# Allegro board LCDPORT_20151023_3.brd
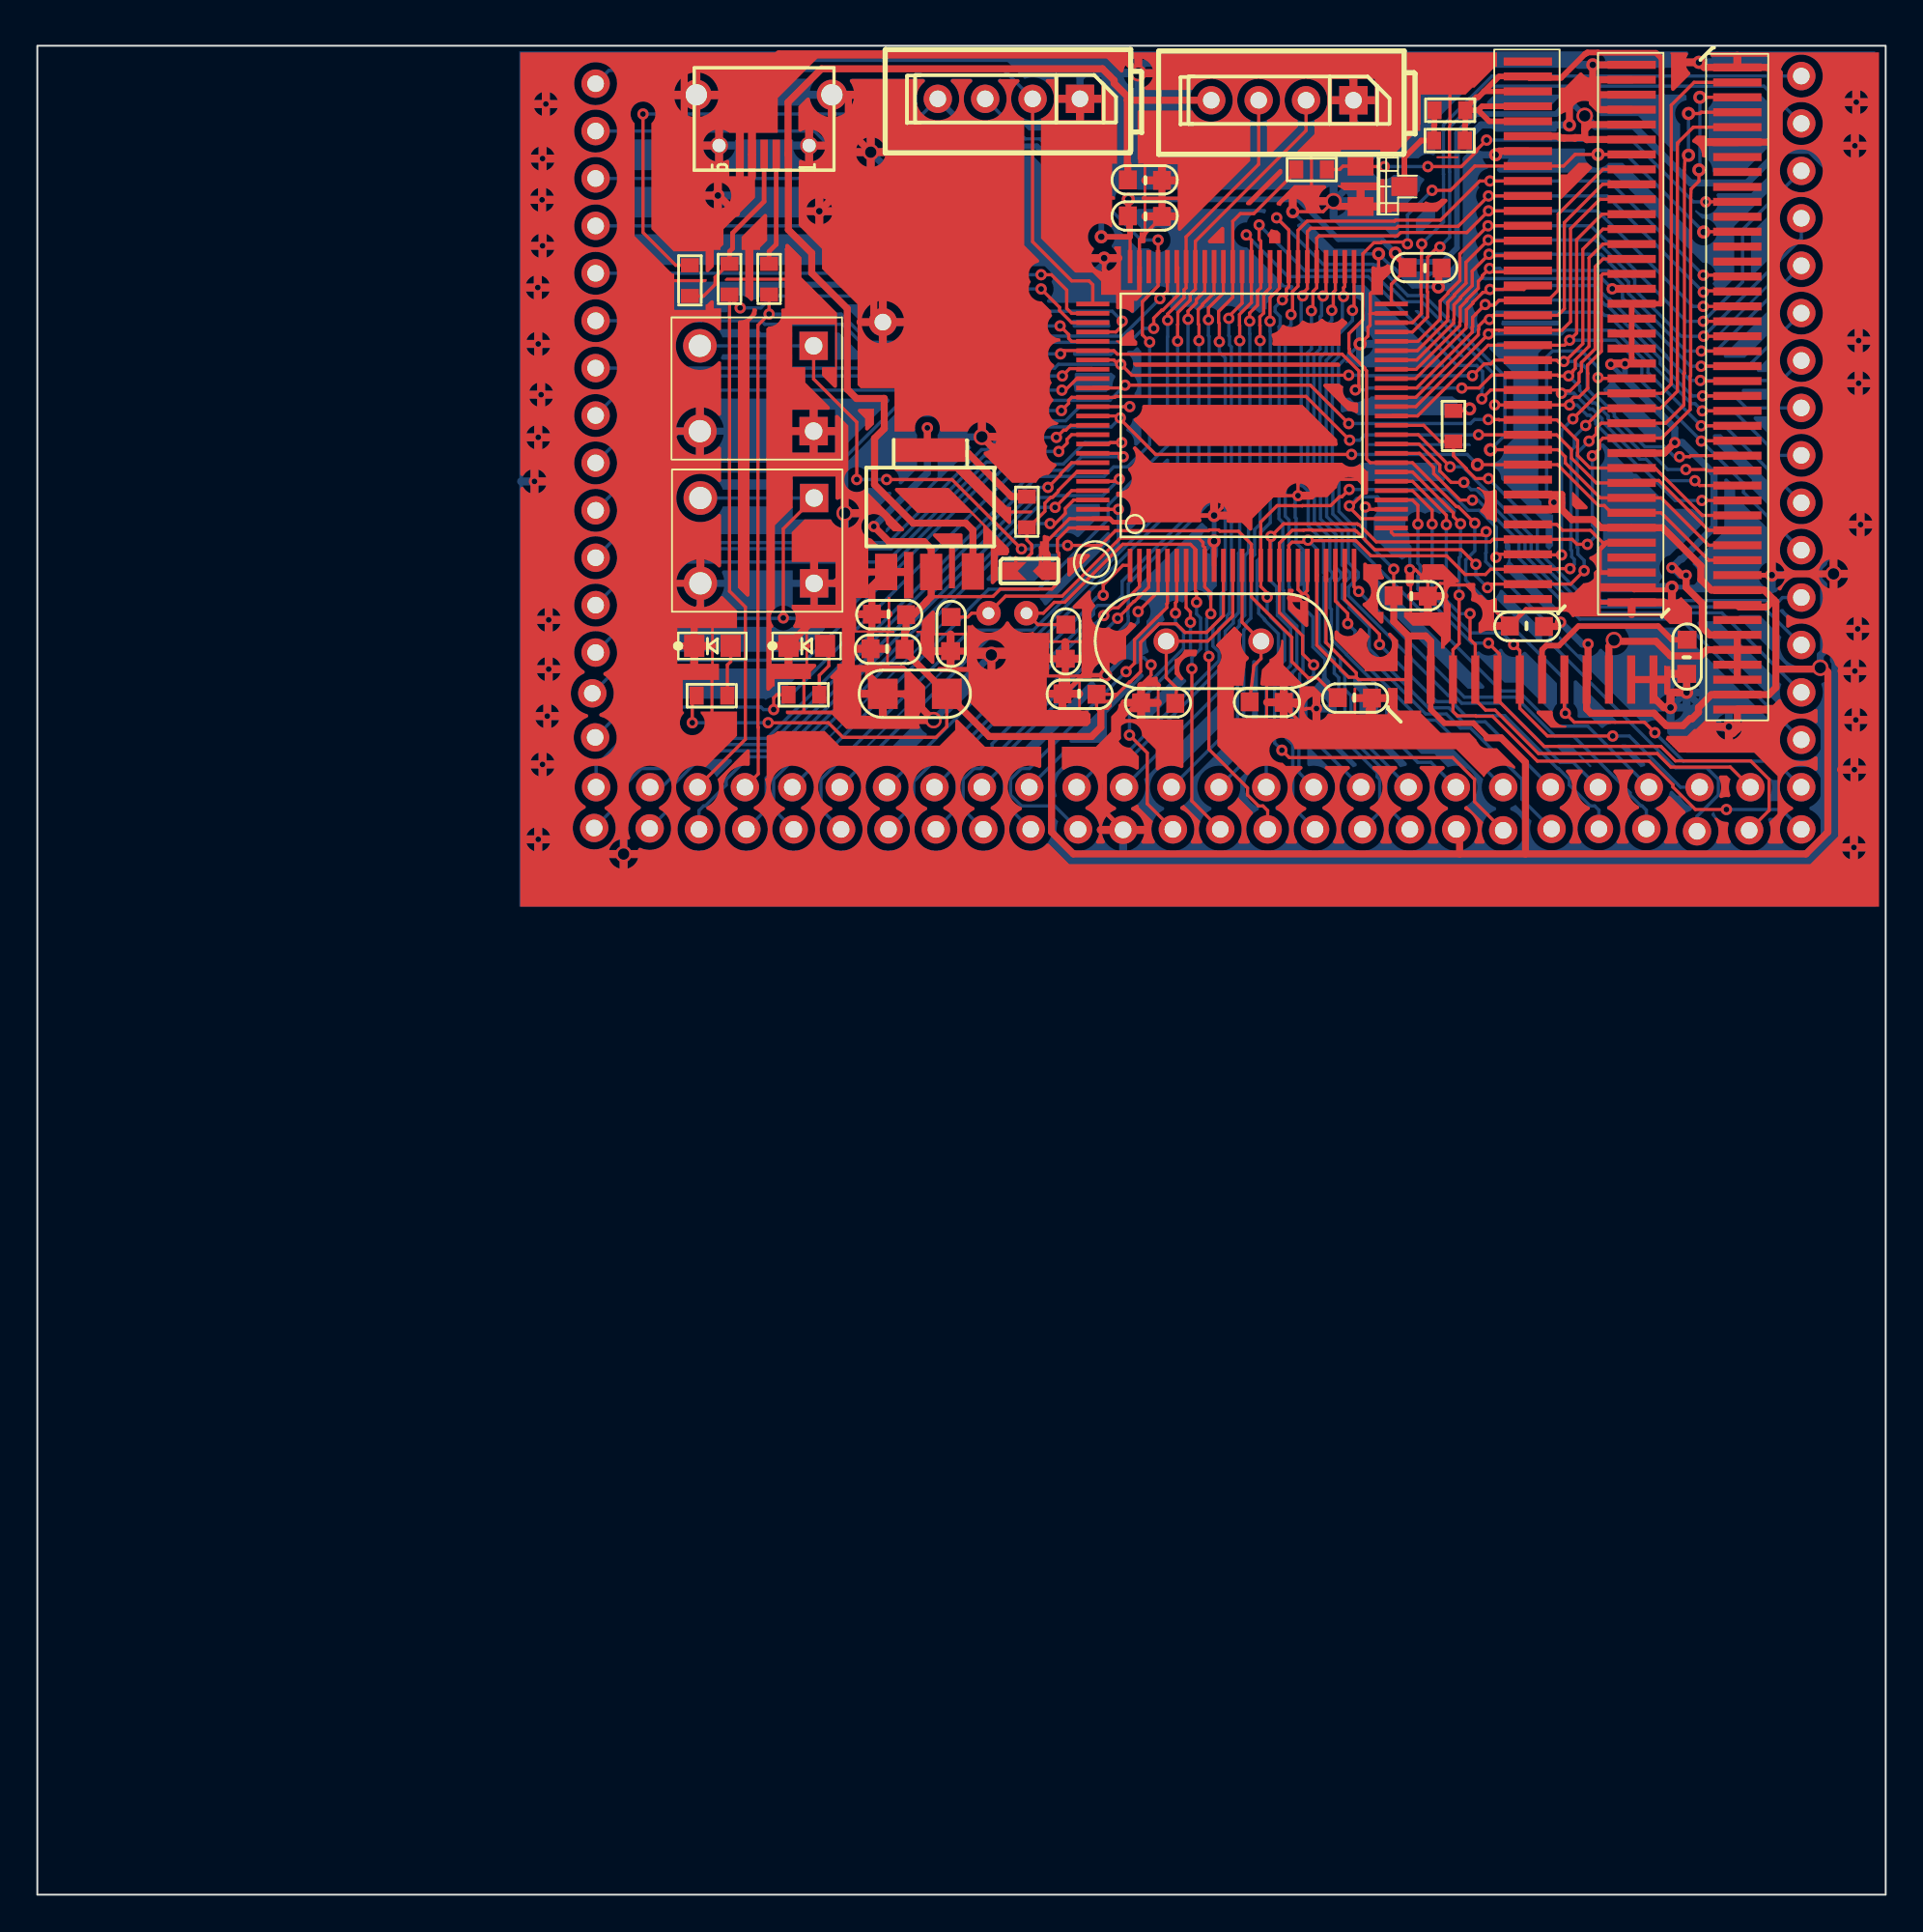
[diagram p0: board, top side]
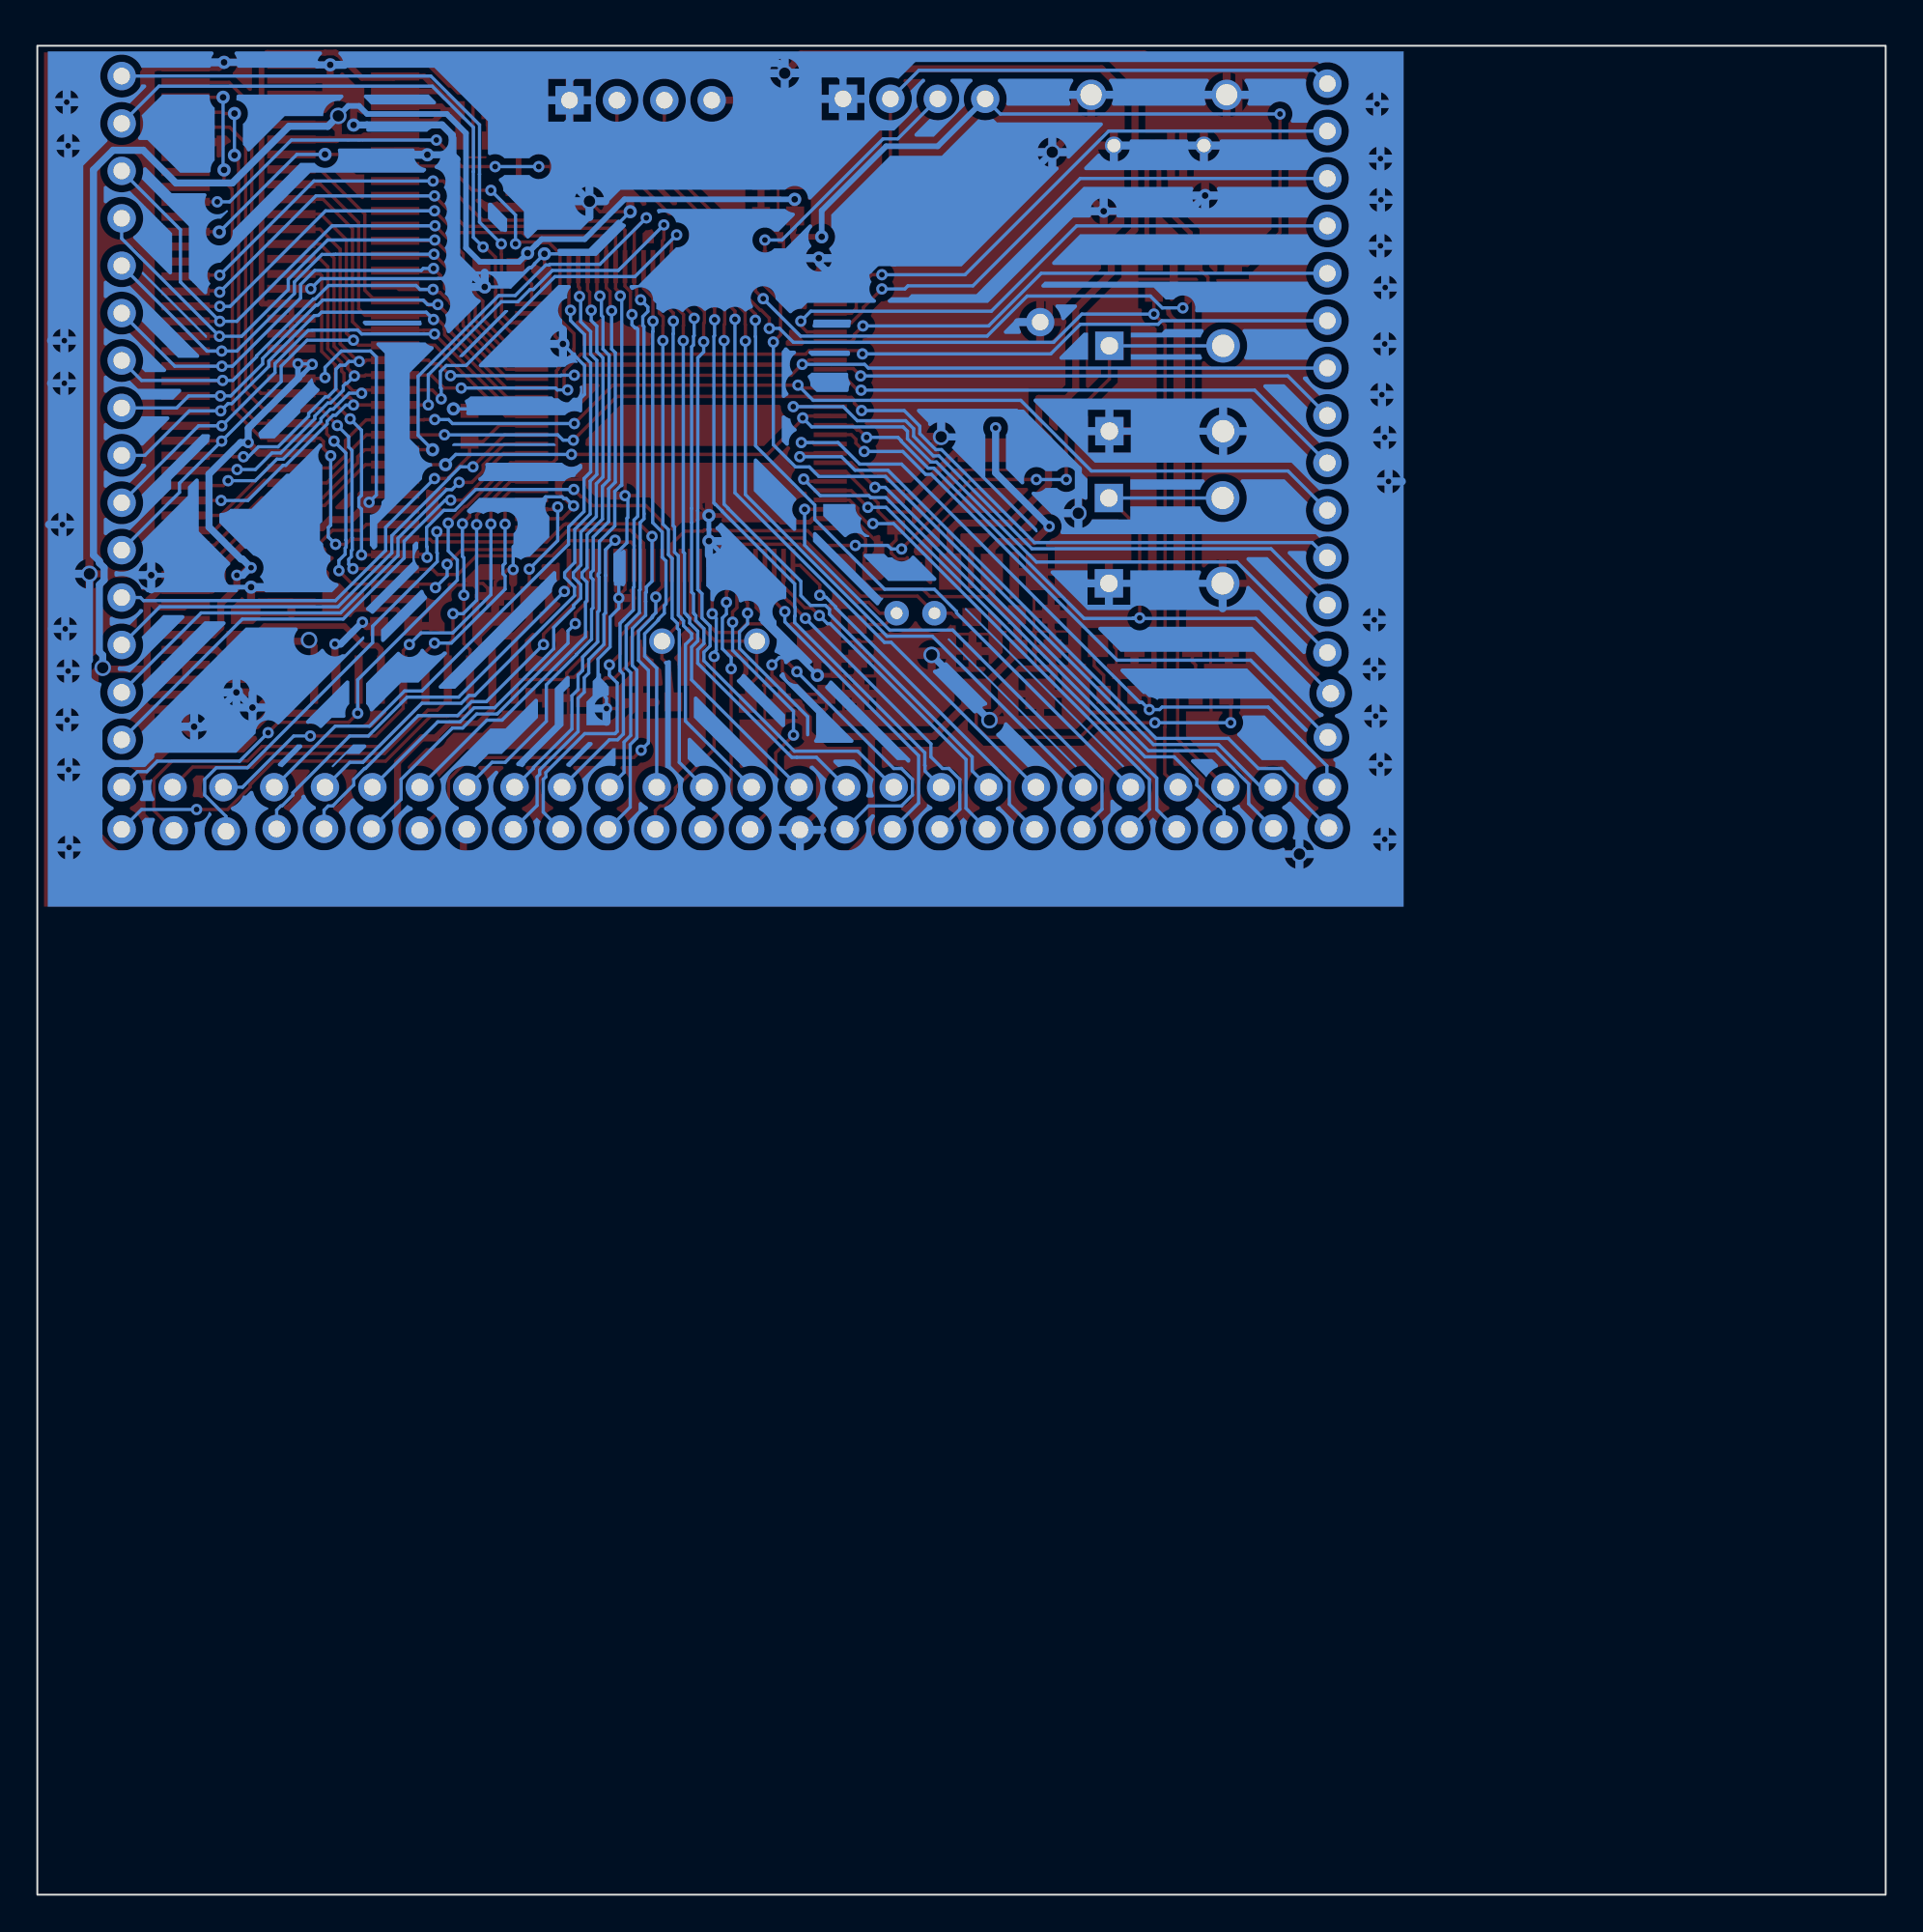
[diagram p1: board, bottom side, seen from below]

Outline 99.06 x 99.06 mm; copper layers: TOP, BOTTOM. Coordinates in mm from the lower left corner of the outline.
Outline path: rectangle 0,0 99.06,99.06

## Placement (name value [footprint] x y rotation side)
C3  0.1U  [C0603X]  70.64 64.11 0 top
C4  15pF  [C0603]  60.07 63.86 180 top
C5  15pF  [C0603]  65.89 63.88 0 top
C6  10pF  [C0603]  55.12 67.13 90 top
C7  0.1uf  [C0603X]  74.32 87.17 180 top
C8  0.1uf  [C0603X]  79.86 67.94 0 top
C9  0.1uf  [C0603X]  55.88 64.31 0 top
C10  0.1uf  [C0603X]  59.33 89.94 180 top
C11  10pF  [C0603]  48.97 67.54 90 top
C13  10uf/1206  [C1206]  48.74 64.34 270 top
C14  0.1uf  [C0603X]  59.33 91.87 180 top
C32  0.1uf  [C0603X]  73.58 69.6 180 top
C33  0.1uf  [C0603X]  45.67 68.58 0 top
C34  0.1uf  [C0603X]  45.59 66.73 0 top
C35  0.1uf  [C0603X]  88.42 66.34 90 top
GND1  TEST  [TEST_60C35D]  58.19 57.05 0 top
GND9  TEST  [TEST_60C35D]  45.31 84.25 0 top
J11  0  [DEBUG0603_V1]  53.34 70.92 180 top
J_HX8352A  -  [FFC_08_44]  91.11 80.7 0 top
J_R61509  FFC_08_44  [FFC_08_37]  79.88 86.61 180 top
J_ST7585  FFC_08_44  [FFC_12_12]  79.45 65.1 90 top
J_XT350377  FFC_08_44  [FFC_08_37]  85.45 86.44 180 top
K1  KEY  [SW4H]  35.53 70.26 90 top
LED1  LED  [LED_SMD]  40.11 66.9 90 top
LED_POWER  LED  [LED_SMD]  35.05 66.9 90 top
PA0  TEST  [TEST_60C35D]  81.15 57.1 0 top
PA1  TEST  [TEST_60C35D]  83.69 57.1 0 top
PA2  TEST  [TEST_60C35D]  86.23 57.1 0 top
PA3  TEST  [TEST_60C35D]  88.95 56.97 0 top
PA4  TEST  [TEST_60C35D]  91.74 57.02 0 top
PA5  TEST  [TEST_60C35D]  89.09 59.33 0 top
PA6  TEST  [TEST_60C35D]  91.81 59.33 0 top
PA7  TEST  [TEST_60C35D]  94.54 57.07 0 top
PA8  TEST  [TEST_60C35D]  45.54 59.33 0 top
PA9  TEST  [TEST_60C35D]  43 59.33 0 top
PA10  TEST  [TEST_60C35D]  40.46 59.33 0 top
PA11  TEST  [TEST_60C35D]  37.92 59.33 0 top
PA12  TEST  [TEST_60C35D]  35.38 59.33 0 top
PA13  TEST  [TEST_60C35D]  32.84 59.33 0 top
PA14  TEST  [TEST_60C35D]  29.92 97.03 0 top
PA15  TEST  [TEST_60C35D]  29.92 94.49 0 top
PB0  TEST  [TEST_60C35D]  94.54 64.41 0 top
PB1  TEST  [TEST_60C35D]  94.54 66.95 0 top
PB2  TEST  [TEST_60C35D]  94.54 69.49 0 top
PB3  TEST  [TEST_60C35D]  29.74 64.36 0 top
PB4  TEST  [TEST_60C35D]  29.9 62 0 top
PB5  TEST  [TEST_60C35D]  29.95 59.33 0 top
PB6  TEST  [TEST_60C35D]  29.84 57.15 0 top
PB7  TEST  [TEST_60C35D]  32.82 57.12 0 top
PB8  TEST  [TEST_60C35D]  35.46 57.07 0 top
PB9  TEST  [TEST_60C35D]  38 57.07 0 top
PB10  TEST  [TEST_60C35D]  94.54 94.89 0 top
PB11  TEST  [TEST_60C35D]  94.54 97.43 0 top
PB12  TEST  [TEST_60C35D]  86.37 59.33 0 top
PB13  TEST  [TEST_60C35D]  83.64 59.33 0 top
PB14  TEST  [TEST_60C35D]  81.1 59.33 0 top
PB15  TEST  [TEST_60C35D]  78.56 59.33 0 top
PC0  TEST  [TEST_60C35D]  78.56 57.02 0 top
PC1  TEST  [TEST_60C35D]  68.48 57.07 0 top
PC2  TEST  [TEST_60C35D]  71.02 57.07 0 top
PC3  TEST  [TEST_60C35D]  73.56 57.07 0 top
PC4  TEST  [TEST_60C35D]  94.53 59.33 0 top
PC5  TEST  [TEST_60C35D]  94.54 61.87 0 top
PC6  TEST  [TEST_60C35D]  55.7 59.33 0 top
PC7  TEST  [TEST_60C35D]  53.16 59.33 0 top
PC8  TEST  [TEST_60C35D]  50.62 59.33 0 top
PC9  TEST  [TEST_60C35D]  48.08 59.33 0 top
PC10  TEST  [TEST_60C35D]  29.92 91.95 0 top
PC11  TEST  [TEST_60C35D]  29.92 89.41 0 top
PC12  TEST  [TEST_60C35D]  29.92 86.87 0 top
PC13  TEST  [TEST_60C35D]  60.86 57.07 0 top
PC14  TEST  [TEST_60C35D]  63.4 57.07 0 top
PC15  TEST  [TEST_60C35D]  65.94 57.07 0 top
PD0  TEST  [TEST_60C35D]  29.92 84.33 0 top
PD1  TEST  [TEST_60C35D]  29.92 81.79 0 top
PD2  TEST  [TEST_60C35D]  29.92 79.25 0 top
PD3  TEST  [TEST_60C35D]  29.92 76.71 0 top
PD4  TEST  [TEST_60C35D]  29.92 74.17 0 top
PD5  TEST  [TEST_60C35D]  29.92 71.63 0 top
PD6  TEST  [TEST_60C35D]  29.92 69.09 0 top
PD7  TEST  [TEST_60C35D]  29.92 66.55 0 top
PD8  TEST  [TEST_60C35D]  76.02 59.33 0 top
PD9  TEST  [TEST_60C35D]  73.48 59.33 0 top
PD10  TEST  [TEST_60C35D]  70.94 59.33 0 top
PD11  TEST  [TEST_60C35D]  68.4 59.33 0 top
PD12  TEST  [TEST_60C35D]  65.86 59.33 0 top
PD13  TEST  [TEST_60C35D]  63.32 59.33 0 top
PD14  TEST  [TEST_60C35D]  60.78 59.33 0 top
PD15  TEST  [TEST_60C35D]  58.24 59.33 0 top
PE0  TEST  [TEST_60C35D]  40.54 57.07 0 top
PE1  TEST  [TEST_60C35D]  43.08 57.07 0 top
PE2  TEST  [TEST_60C35D]  45.62 57.07 0 top
PE3  TEST  [TEST_60C35D]  48.16 57.07 0 top
PE4  TEST  [TEST_60C35D]  50.7 57.07 0 top
PE5  TEST  [TEST_60C35D]  53.24 57.07 0 top
PE6  TEST  [TEST_60C35D]  55.78 57.07 0 top
PE7  TEST  [TEST_60C35D]  94.54 72.03 0 top
PE8  TEST  [TEST_60C35D]  94.54 74.57 0 top
PE9  TEST  [TEST_60C35D]  94.54 77.11 0 top
PE10  TEST  [TEST_60C35D]  94.54 79.65 0 top
PE11  TEST  [TEST_60C35D]  94.54 82.19 0 top
PE12  TEST  [TEST_60C35D]  94.54 84.73 0 top
PE13  TEST  [TEST_60C35D]  94.54 87.27 0 top
PE14  TEST  [TEST_60C35D]  94.54 89.81 0 top
PE15  TEST  [TEST_60C35D]  94.54 92.35 0 top
Q4  SI2306DS  [SOT23-3]  72.09 91.52 90 top
R21  10k  [R0603]  75.9 78.66 90 top
R26  10k  [R0603]  53.04 74.07 90 top
R38  10  [R0603]  39.22 86.54 90 top
R39  10  [R0603]  37.1 86.54 90 top
R40  1.5K  [R0603]  34.98 86.46 90 top
R41  3.3K  [R0603]  36.17 64.24 180 top
R42  3.3K  [R0603]  41.1 64.29 180 top
R43  10  [R0603]  75.67 93.98 0 top
R44  10  [R0603]  75.69 95.61 0 top
R45  10  [R0603]  68.28 92.43 0 top
REST1  KEY  [SW4H]  35.51 78.41 90 top
STM32_DEBUG1  -  [HEADER4]  55.88 96.22 180 top
U6  MICRO_USB  [MICRO_USB_B_V1]  38.95 92.42 90 top
U10  LM1117-33  [SOT-223]  47.83 70.92 0 top
U13  STM32F103VET6  [LQFP100]  64.57 79.22 90 top
UART1  -  [HEADER4]  70.54 96.14 180 top
UNK3V3  TEST  [TEST_60C35D]  76.05 57.07 0 top
Y1  8M  [9-216M]  65.58 67.16 180 top
Y2  32.768K/32ka-2  [32KA-2]  50.98 68.66 0 top

## Library data of the parts
C3-C6 C11 = CAP NP_4
C7-C10 C14 C32-C35 = C_0
C13 = CAP_0
GND1 GND9 PA0-PA15 PB0-PB15 PC0-PC15 PD0-PD15 PE0-PE15 UNK3V3 = TESTPONT
J11 = JUMPER1_0
J_HX8352A = J_HX8352A
J_R61509 = J_R61509
J_ST7585 = J_ST7585
J_XT350377 = J_XT350377
K1 REST1 = CON2_7
LED1 LED_POWER = LED
Q4 = MOSFET_I_EN_0
R21 R26 R38-R40 R43-R45 = RESISTOR_0
R41 R42 = R_0
STM32_DEBUG1 = HEADER 5_1
U6 = MICRO_USB
U10 = 1117
U13 = STM32
UART1 = HEADER 5_0
Y1 Y2 = CRYSTAL_2

## Footprints (pads in the part's own frame, mm; a bottom-side part is the same pattern mirrored in y, then rotated)
9-216M
  round 1.372 hole 0.889: 1(0,0) 2(5.08,0)
32KA-2
  round 1.321 hole 0.635: 1(0,0) 2(2.032,0)
C0603
  rect 0.965x1.016 smd: 1(-0.914,0.025) 2(0.914,0)
C0603X
  rect 0.965x1.016 smd: 1(-0.94,0.025) 2(0.889,0)
C1206
  rect 1.626x1.6 smd: 1(0,0) 2(0,-3.429)
DEBUG0603_V1
  custom 1.499x0.965 smd: 1(-0.762,0)
  custom 1.397x0.965 smd: 2(1.016,0)
FFC_08_37
  rect 2.591x0.432 smd: 1(0,17.201) 2(0,16.401) 3(0,15.601) 4(0,14.801) 5(0,14) 6(0,13.2) 7(0,12.4) 8(0,11.6) 9(0,10.8) 10(0,10) 11(0,9.2) 12(0,8.4) 13(0,7.6) 14(0,6.8) 15(0,5.999) 16(0,5.199) 17(0,4.399) 18(0,3.599) 19(0,2.799) 20(0,1.999) 21(0,1.199) 22(0,0.399) 23(0,-0.399) 24(0,-1.199) 25(0,-1.999) 26(0,-2.799) 27(0,-3.599) 28(0,-4.399) 29(0,-5.199) 30(0,-5.999) 31(0,-6.8) 32(0,-7.6) 33(0,-8.4) 34(0,-9.2) 35(0,-10) 36(0,-10.8) 37(0,-11.6)
FFC_08_44
  rect 2.591x0.432 smd: 1(0,17.201) 2(0,16.401) 3(0,15.601) 4(0,14.801) 5(0,14) 6(0,13.2) 7(0,12.4) 8(0,11.6) 9(0,10.8) 10(0,10) 11(0,9.2) 12(0,8.4) 13(0,7.6) 14(0,6.8) 15(0,5.999) 16(0,5.199) 17(0,4.399) 18(0,3.599) 19(0,2.799) 20(0,1.999) 21(0,1.199) 22(0,0.399) 23(0,-0.399) 24(0,-1.199) 25(0,-1.999) 26(0,-2.799) 27(0,-3.599) 28(0,-4.399) 29(0,-5.199) 30(0,-5.999) 31(0,-6.8) 32(0,-7.6) 33(0,-8.4) 34(0,-9.2) 35(0,-10) 36(0,-10.8) 37(0,-11.6) 38(0,-12.4) 39(0,-13.2) 40(0,-14) 41(0,-14.801) 42(0,-15.601) 43(0,-16.401) 44(0,-17.201)
FFC_12_12
  rect 2.591x0.432 smd: 1(0,5.969) 2(0,4.775) 3(0,3.581) 4(0,2.388) 5(0,1.194) 6(0,0) 7(0,-1.194) 8(0,-2.388) 9(0,-3.581) 10(0,-4.775) 11(0,-5.969) 12(0,-7.163)
HEADER4
  rect 1.524x1.524 hole 0.889: 1(0,0)
  round 1.524 hole 0.889: 2(2.54,0) 3(5.08,0) 4(7.62,0)
LED_SMD
  rect 1.194x1.092 smd: 1(0,-2.108) 2(0,-0.152)
LQFP100
  rect 1.778x0.254 smd: 1(-8.001,6.002) 2(-8.001,5.502) 3(-8.001,5.001) 4(-8.001,4.501) 5(-8.001,4) 6(-8.001,3.5) 7(-8.001,3) 8(-8.001,2.502) 9(-8.001,2.002) 10(-8.001,1.501) 11(-8.001,1.001) 12(-8.001,0.5) 13(-8.001,0) 14(-8.001,-0.5) 15(-8.001,-1.001) 16(-8.001,-1.501) 17(-8.001,-2.002) 18(-8.001,-2.502) 19(-8.001,-3) 20(-8.001,-3.5) 21(-8.001,-4) 22(-8.001,-4.501) 23(-8.001,-5.001) 24(-8.001,-5.502) 25(-8.001,-6.002) 51(8.001,-6.002) 52(8.001,-5.502) 53(8.001,-5.001) 54(8.001,-4.501) 55(8.001,-4) 56(8.001,-3.5) 57(8.001,-3) 58(8.001,-2.502) 59(8.001,-2.002) 60(8.001,-1.501) 61(8.001,-1.001) 62(8.001,-0.5) 63(8.001,0) 64(8.001,0.5) 65(8.001,1.001) 66(8.001,1.501) 67(8.001,2.002) 68(8.001,2.502) 69(8.001,3) 70(8.001,3.5) 71(8.001,4) 72(8.001,4.501) 73(8.001,5.001) 74(8.001,5.502) 75(8.001,6.002)
  rect 0.254x1.778 smd: 26(-6.002,-8.001) 27(-5.502,-8.001) 28(-5.001,-8.001) 29(-4.501,-8.001) 30(-4,-8.001) 31(-3.5,-8.001) 32(-3,-8.001) 33(-2.502,-8.001) 34(-2.002,-8.001) 35(-1.501,-8.001) 36(-1.001,-8.001) 37(-0.5,-8.001) 38(0,-8.001) 39(0.5,-8.001) 40(1.001,-8.001) 41(1.501,-8.001) 42(2.002,-8.001) 43(2.502,-8.001) 44(3,-8.001) 45(3.5,-8.001) 46(4,-8.001) 47(4.501,-8.001) 48(5.001,-8.001) 49(5.502,-8.001) 50(6.002,-8.001) 76(6.002,8.001) 77(5.502,8.001) 78(5.001,8.001) 79(4.501,8.001) 80(4,8.001) 81(3.5,8.001) 82(3,8.001) 83(2.502,8.001) 84(2.002,8.001) 85(1.501,8.001) 86(1.001,8.001) 87(0.5,8.001) 88(0,8.001) 89(-0.5,8.001) 90(-1.001,8.001) 91(-1.501,8.001) 92(-2.002,8.001) 93(-2.502,8.001) 94(-3,8.001) 95(-3.5,8.001) 96(-4,8.001) 97(-4.501,8.001) 98(-5.001,8.001) 99(-5.502,8.001) 100(-6.002,8.001)
MICRO_USB_B_V1
  rect 1.6x0.406 smd: 1(0.813,-1.3) 2(0.813,-0.65) 3(0.813,0) 4(0.813,0.65) 5(0.813,1.3)
  round 0.965 hole 0.711: 6(1.295,2.413) 7(1.295,-2.413)
  round 1.626 hole 1.143: 8(4.013,-3.632) 9(4.013,3.632)
R0603
  rect 0.762x0.965 smd: 1(-0.813,0) 2(0.838,0)
SOT23-3
  rect 1.016x1.397 smd: 1(1.092,1.168) 2(-1.067,1.168) 3(0,-1.181)
SOT-223
  rect 1.194x1.956 smd: 1(-2.337,-0.051) 2(0.076,-0.051) 3(2.311,-0.025)
  rect 3.81x1.27 smd: 4(0,6.477)
SW4H
  round 1.803 hole 1.194: 1(0,0) 2(4.572,0)
  rect 1.524x1.524 hole 0.94: 3(0,-6.096) 4(4.572,-6.096)
TEST_60C35D
  round 1.524 hole 0.889: 1(0,0)

## Nets
5V_IN: C14.2 U6.1(VDD) U10.3(IN) UART1.4
VDD_STM32: C7.2 C8.2 C9.2 C10.2 C13.1 C32.2 C33.2 C34.2 J_HX8352A.36(IOVCC) J_HX8352A.37(VCC) J_HX8352A.43(LEDK_VCC) J_R61509.7(VCC1) J_R61509.8(VCC2) J_R61509.32(A) J_ST7585.1(VDD0) J_ST7585.2(VDD1) J_ST7585.9(LED+) J_XT350377.6(IOVCC) J_XT350377.16(LEDA) J_XT350377.32(VCI) J_XT350377.33(IOVCC2) R26.2 R40.2 R41.2 STM32_DEBUG1.4 U10.2(OUT) U10.4 U13.11(VDD_5) U13.21(VREF+) U13.22(VDDA) U13.28(VDD_4) U13.50(VDD_1) U13.75(VDD_2) U13.100(VDD_3) UNK3V3.1
VDDBAT_STM32: U13.6(VBAT)
BOOT0: J11.2 R26.1 U13.94(BOOT0)
BOOT1: PB2.1 R21.1 U13.37(PB2/BOOT1)
KEY1: K1.2 K1.4 PB3.1 U13.89(PB3/JTDO/TRACESWO/I2S3_CK/TIM2_)
LCD_BL_EN: J_HX8352A.10(PWM_OUT) Q4.1(G) R45.2
LCD_BL_K: J_HX8352A.39(LEDK4) J_HX8352A.40(LEDK3) J_HX8352A.41(LEDK2) J_HX8352A.42(LEDK1) J_R61509.33(K1) J_R61509.34(K2) J_R61509.35(K3) J_R61509.36(K4) J_ST7585.10(LED-) J_XT350377.11(K6) J_XT350377.17(LED1) J_XT350377.18(LED2) J_XT350377.19(LED3) J_XT350377.20(LED4) J_XT350377.21(LED5) R43.2 R44.2
LED1: PB5.1 R42.2 U13.91(PB5/I2C1_SMBA/I2S3_SD/TIM3_CH2/)
OSC32_IN: C6.2 PC14.1 U13.8(PC14-OSC32_IN) Y2.2
OSC32_OUT: C11.2 PC15.1 U13.9(PC15-OSC32_OUT) Y2.1
OSC_IN: C4.1 U13.12(OSC_IN) Y1.2
OSC_OUT: C5.1 U13.13(OSC_OUT) Y1.1
PA0: PA0.1 U13.23(PA0/WKAP/USART2_CTS(6)/ADC123_I)
PA1: PA1.1 U13.24(PA1/USART2_RTS(6)/ADC123_IN1/TI)
PA2: PA2.1 U13.25(PA2/USART2_TX(6)/ADC123IN2/TIM2)
PA3: PA3.1 U13.26(PA3/USART2RX/ADC123IN3/TIM2/5_C)
PA4: J_ST7585.5(CS) PA4.1 U13.29(PA4/SPI1_NSS/USART2_CK/ADC12_IN)
PA5: J_ST7585.6(SCL) PA5.1 U13.30(PA5/SPI1_SCK/ADC12_IN5/DAC_OUT2)
PA6: J_ST7585.4(RS) PA6.1 U13.31(PA6/SPI1_MISO/ADC12IN6/TIM3_CH1)
PA7: J_ST7585.3(SI) PA7.1 U13.32(PA7/SPI1_MOSI/ADC12IN7/TIM3_CH2)
PA8: PA8.1 U13.67(PA8/USART1_CK//TIM1_CH1/MCO)
PA9: PA9.1 U13.68(PA9/USART_TX/TIM1_CH2) UART1.2
PA10: PA10.1 U13.69(PA10/USART_RX/TIM1_CH3) UART1.3
PA11: PA11.1 R38.1 U13.70(PA11/USART1_CTS/CANRX/TIM1_CH4/)
PA12: PA12.1 R39.1 U13.71(PA12/USART1RTS/CANTX/TIM1ETR/US)
PA13: PA13.1 STM32_DEBUG1.3 U13.72(PA13/JTMS/SWDIO)
PA14: PA14.1 STM32_DEBUG1.2 U13.76(PA14/JTCK/SWCLK)
PA15: PA15.1 U13.77(PA15/JTDI/SPI3_NSS/I2S3_WS)
PB0: PB0.1 U13.35(PB0/ADC12_IN8/TIM3_CH3/TIM8_CH2)
PB1: PB1.1 U13.36(PB1/ADC12_IN9/TIM3_CH4/TIM8_CH3)
PB4: PB4.1 U13.90(PB4/NJTRST/SPI3_MISO/TIM3_CH1/S)
PB6: PB6.1 U13.92(PB6/I2C1_SCL/TIM4_CH1/USART1_TX)
PB7: PB7.1 U13.93(PB7/I2C1_SDA/FSMC_NADV/TIM4_CH2)
PB8: PB8.1 U13.95(PB8/TIM4_CH3/SDIO_D4/I2C1_SCL/C)
PB9: PB9.1 U13.96(PB9/TIM4_CH4/SDIO_D5/I2C1_SDA/C)
PB10: PB10.1 U13.47(PB10/I2C2_SCL/USART3_TX/TIM2_CH)
PB11: PB11.1 U13.48(PB11/I2C2_SDA/USART3_RX/TIM2_CH)
PB12: PB12.1 U13.51(PB12/SPI2_NSS/I2S2_WS/I2C2_SMBA)
PB13: PB13.1 U13.52(PB13/SPI2_SCK/I2S2_CK/USART3_CT)
PB14: PB14.1 U13.53(PB14/SPI2_MISO/TIM1_CH2N/USART3)
PB15: PB15.1 U13.54(PB15/SPI2_MOSI/I2S2_SD/TIM1_CH3)
PC0: J_HX8352A.2(NC/YD) J_R61509.4(YD) J_XT350377.15(YD) PC0.1 U13.15(ADC12_IN10/PC0)
PC1: J_HX8352A.3(NC/XR) J_R61509.5(XR) J_XT350377.12(XR) PC1.1 U13.16(ADC12_IN11/PC1)
PC2: J_HX8352A.4(NC/YU) J_R61509.2(YU) J_XT350377.13(YU) PC2.1 U13.17(ADC12_IN12/PC2)
PC3: J_HX8352A.5(NC/XL) J_R61509.3(XL) J_XT350377.14(XL) PC3.1 U13.18(ADC12_IN13/PC3)
PC4: J_HX8352A.12(RESET) J_R61509.30(RST) J_ST7585.8(RES) J_XT350377.31(RESET) PC4.1 U13.33(ADC12_IN14/PC4)
PC5: PC5.1 U13.34(ADC12_IN15/PC5)
PC6: PC6.1 U13.63(PC6/I2S2_MCK/TIM8_CH1/SDIO_D6/T)
PC7: PC7.1 R45.1 U13.64(PC7/I2S3_MCK/TIM8_CH2/SDIO_D7/T)
PC8: PC8.1 U13.65(PC8/TIM8_CH3/SDIO_D0/TIM3_CH3)
PC9: PC9.1 U13.66(PC9/TIM8_CH4/SDIO_D1/TIM3_CH4)
PC10: PC10.1 U13.78(PC10/USART4_TX/SDIO_D2/USART3_T)
PC11: PC11.1 U13.79(PC11/USART4_RX/SDIO_D3/USART3_R)
PC12: PC12.1 U13.80(PC12/USART5_TX/SDIO_CK/USART3_C)
PC13: PC13.1 U13.7(PC13-TAMPER-RTC)
PD0: J_HX8352A.28(D2) J_R61509.16(D2) J_XT350377.25(DB10) PD0.1 U13.81(PD0/FSMC_D2/CAN_RX)
PD1: J_HX8352A.27(D3) J_R61509.17(D3) J_XT350377.26(DB11) PD1.1 U13.82(PD1/FSMC_D3/CAN_TX)
PD2: PD2.1 U13.83(PD2/TIM3_ETR)
PD3: PD3.1 U13.84(PD3/FSMC_CLK/USART2_CTS)
PD4: J_HX8352A.31(RD) J_R61509.13(RD) J_XT350377.10(RD) PD4.1 U13.85(PD4/FSMC_NOE/USART2_RTS)
PD5: J_HX8352A.32(WR) J_R61509.12(WR) J_XT350377.9(WR) PD5.1 U13.86(PD5/FSMC_NWE/USART2_TX)
PD6: PD6.1 U13.87(PD6/FSMC_NWAIT/USART2_RX)
PD7: J_HX8352A.34(CS) J_R61509.10(CS) J_XT350377.7(CS) PD7.1 U13.88(PD7/FSMC_NE1/FSMC_NCE2/USART2_C)
PD8: J_HX8352A.17(D13) J_R61509.27(D13) PD8.1 U13.55(PD8/FSMC_D13/USART3_TX)
PD9: J_HX8352A.16(D14) J_R61509.28(D14) PD9.1 U13.56(PD9/FSMC_D14/USART3_RX)
PD10: J_HX8352A.15(D15) J_R61509.29(D15) PD10.1 U13.57(PD10/FSMC_D15/USART3_CK)
PD11: J_HX8352A.33(RS) J_R61509.11(RS) J_XT350377.8(RS) PD11.1 U13.58(PD11/FSMC_A16/USART3_CTS)
PD12: PD12.1 U13.59(PD12/FSMC_A17/TIM4_CH1/USART3_R)
PD13: PD13.1 U13.60(PD13/FSMC_A18/TIM4_CH2)
PD14: J_HX8352A.30(D0) J_R61509.14(D0) J_XT350377.23(DB8) PD14.1 U13.61(PD14/FSMC_D0/TIM4_CH3)
PD15: J_HX8352A.29(D1) J_R61509.15(D1) J_XT350377.24(DB9) PD15.1 U13.62(PD15/FSMC_D1/TIM4_CH4)
PE0: PE0.1 U13.97(PE0/TIM4_ETR/FSMC_NBL0)
PE1: PE1.1 U13.98(PE1/FSMC_NBL1)
PE2: PE2.1 U13.1(PE2/TRACECK/FSMC_A23)
PE3: PE3.1 U13.2(PE3/TRACED0/FSMC_A19)
PE4: PE4.1 U13.3(PE4/TRACED1/FSMC_A20)
PE5: PE5.1 U13.4(PE5/TRACED2/FSMC_A21)
PE6: PE6.1 U13.5(PE6/TRACED3/FSMC_A22)
PE7: J_HX8352A.26(D4) J_R61509.18(D4) J_XT350377.27(DB12) PE7.1 U13.38(PE7/FSMC_D4/TIM1_ETR)
PE8: J_HX8352A.25(D5) J_R61509.19(D5) J_XT350377.28(DB13) PE8.1 U13.39(PE8/FSMC_D5/TIM1_CH1N)
PE9: J_HX8352A.24(D6) J_R61509.20(D6) J_XT350377.29(DB14) PE9.1 U13.40(PE9/FSMC_D6/TIM1_CH1)
PE10: J_HX8352A.23(D7) J_R61509.21(D7) J_XT350377.30(DB15) PE10.1 U13.41(PE10/FSMC_D7/TIM1_CH2N)
PE11: J_HX8352A.22(D8) J_R61509.22(D8) PE11.1 U13.42(PE11/FSMC_D8/TIM1_CH2)
PE12: J_HX8352A.21(D9) J_R61509.23(D9) PE12.1 U13.43(PE12/FSMC_D9/TIM1_CH3N)
PE13: J_HX8352A.20(D10) J_R61509.24(D10) PE13.1 U13.44(PE13/FSMC_D10/TIM1_CH3)
PE14: J_HX8352A.19(D11) J_R61509.25(D11) PE14.1 U13.45(PE14/FSMC_D11/TIM1_CH4)
PE15: J_HX8352A.18(D12) J_R61509.26(D12) PE15.1 U13.46(PE15/FSMC_D12/TIM1_BKIN)
REST_STM32: C3.1 REST1.2 REST1.4 U13.14(NRST)
VREF_GND: C3.2 C4.2 C5.2 C6.1 C7.1 C8.1 C9.1 C10.1 C11.1 C13.2 C14.1 C32.1 C33.1 C34.1 C35.1 GND1.1 GND9.1 J11.1 J_HX8352A.1(GND7) J_HX8352A.6(GND8) J_HX8352A.35(GND2) J_HX8352A.44(GND) J_R61509.6(GND) J_R61509.31(GND3) J_ST7585.11(VSS) J_ST7585.12(VSS1) J_XT350377.1(GND1) J_XT350377.2(GND2) J_XT350377.3(GND3) J_XT350377.5(GND4) J_XT350377.22(GND5) J_XT350377.34(GND6) J_XT350377.35(GND7) J_XT350377.36(GND8) J_XT350377.37(GND9) K1.1 K1.3 LED1.2(CATHODE) LED_POWER.2(CATHODE) Q4.2(S) R21.2 REST1.1 REST1.3 STM32_DEBUG1.1 U6.4(ID) U6.5(GND) U6.6(NC1) U6.7(NC2) U6.8(NC3) U6.9(NC4) U10.1 U13.10(VSS_5) U13.19(VSSA) U13.20(VREF-) U13.27(VSS_4) U13.49(VSS_1) U13.74(VSS_2) U13.99(VSS_3) UART1.1
N17074956: J_R61509.1(NC)
N17075008: J_R61509.9(NC2)
N17075232: J_R61509.37(NC4)
N17121879: C35.2 J_ST7585.7(VLCD)
N17142445: Q4.3(D) R43.1 R44.1
N17146400: R38.2 U6.2(DM)
N17146402: R39.2 R40.1 U6.3(DP)
N170843980: LED1.1(ANODE) R42.1
N170844080: LED_POWER.1(ANODE) R41.1

Pads without a net: J_HX8352A 7 8 9 11 13 14 38; J_XT350377 4; U13 73

## Via types
v1: diameter 0.61, hole 0.305, TOP to BOTTOM, 203 vias
v2: diameter 0.889, hole 0.61, TOP to BOTTOM, 12 vias
v3: diameter 0.711, hole 0.356, TOP to BOTTOM, 31 vias

## Routing (per net, layer and track width the routed paths; a pad name or vN(x,y) marks a point on that pad's centre or on a via; arc(x,y) is an arc through that point)
5V_IN: length 60.8
  TOP w0.381: C14.2 58.45,92.73 58.42,92.75 58.42,96.14 ; U10.3 50.14,73.1 49.76,73.48 46.94,73.48 44.87,75.55 44.87,78.03 45.39,78.55 45.39,80.16 43.9,80.16 43.41,80.66 43.41,84.98 41.5,86.88 41.5,87.95 40.25,89.2 U6.1 40.23,93.25 40.23,96.03 42.03,97.83 57.09,97.83 57.71,97.2 57.71,97.05 58.42,96.34 58.42,96.14 ; UART1.4 58.42,96.14
VDD_STM32: length 377.9
  TOP w0.178: U13.22 69.07,67.08 70.69,65.46 70.69,65.23 ; U13.28 71.3,74.22 v1(71.17,74.35) ; 48.74,64.33 48.74,62.58 48.17,62.01 43.17,62.01 42.39,62.79 v1(39.17,62.79) ; 70.69,65.23 70.28,65.23 68.57,66.94 U13.21 ; 70.69,65.23 70.81,65.1 J_ST7585.1 ; 58.56,89.07 58.45,89.19 C10.2 ; 47.9,69.54 50.59,69.54 50.6,69.56 51.22,69.56 51.62,69.95 54.37,69.95 54.75,70.33 54.75,71.87 54.67,71.95 54.67,72.61 55.29,73.22 U13.100 ; 56.77,64.31 57.15,63.93 57.49,63.93 ; 56.77,64.31 57.83,64.31 57.85,64.29 ; 56.77,64.31 56.77,63.56 56.93,63.4 57,63.4 57.16,63.56 57.35,63.56 57.49,63.7 57.49,63.93 ; v1(81.28,74.6) 81.67,74.6 81.7,74.57 ; U13.50 72.57,86.28 73.43,87.15 C7.2 ; v1(35.1,62.79) 35.1,64.01 R41.2 ; 57.85,64.29 57.49,63.93 ; 57.85,64.29 58.54,64.98 58.58,64.98 59.13,65.53 59.13,67.1 60.12,68.08 61.05,68.08 61.51,67.63 62.66,67.63 63.57,68.53 U13.11 ; R40.2 34.21,87.3 32.46,89.05 v1(32.46,95.4) ; 58.56,88.82 U13.75 ; v1(72.69,71.02) C32.2 ; v1(83.64,81.28) 83.69,81.24 J_XT350377.16
  TOP w0.305: C7.2 72.78,87.82 v3(72.78,87.95) ; v3(57.02,88.82) 58.56,88.82 58.56,89.82 C10.2 58.47,89.97 v3(58.47,90.83) ; 77.7,61.98 77.65,62.03 77.65,62.08 76.96,62.76 75.41,62.76 74.68,63.5 J_ST7585.2
  TOP w0.381: v1(44.83,73.3) 45.64,72.49 47.52,72.49 47.9,72.11 U10.2 47.9,69.54 47.65,69.29 47.65,69.27 46.96,68.58 C33.2 46.56,67.73 46.48,67.65 C34.2 46.48,66.61 48.74,64.35 C13.1 48.74,64.33 51.02,62.05 54.36,62.05 ; 82.93,94.14 83.04,94.03 83.38,94.04 J_XT350377.32 ; 82.93,94.14 82.93,94.56 ; 82.93,94.14 82.43,94.14 82.41,94.12 82.41,94.12 82.4,94.11 81.82,94.11 81.82,94.12 81.62,94.12 81.52,94.21 J_R61509.32 ; J_ST7585.1 73.48,67.44 ; 73.48,67.44 74.4,67.44 74.68,67.16 J_ST7585.2 ; 73.48,67.44 72.69,68.22 C32.2 ; v1(81.64,68.17) 81.41,67.94 C8.2 ; J_R61509.7 81.7,74.21 ; 81.7,74.21 82.24,73.67 83.37,73.67 83.8,73.24 J_XT350377.6 87.11,73.24 89.15,71.2 89.15,70.46 89.72,69.9 J_HX8352A.36 92.54,69.9 93.07,69.37 ; 81.7,74.21 81.7,75.01 J_R61509.8 ; 93.07,69.37 92.68,68.99 91.21,68.99 J_HX8352A.37 ; 93.07,69.37 93.17,69.26 93.17,65.66 ; 93.17,65.66 95.81,65.66 ; 93.17,65.66 93.17,64.68 92.79,64.3 J_HX8352A.43 89.72,64.3 89.03,63.6 89.03,63.35 88.68,63 88.57,63 88.2,62.64 87.3,62.64 86.64,63.3 83.26,63.3 83.03,63.53 J_ST7585.9 83.11,65.18 v1(83.11,67.01) ; 95.81,65.66 95.73,65.74 v2(95.55,65.74) ; 95.81,65.66 95.96,65.51 95.96,56.93 94.79,55.76 79.76,55.76 ; 54.36,62.05 56.5,62.05 57,62.54 57,63.4 ; 54.36,62.05 54.36,56.93 55.53,55.76 76.23,55.76 ; UNK3V3.1 76.23,56.9 76.23,55.76 ; 77.7,61.98 78.45,61.98 79.76,60.67 79.76,55.76 ; 82.93,94.56 83.05,94.68 83.2,94.84 J_XT350377.33 ; 82.93,94.56 v2(82.93,95.3) ; 76.23,55.76 79.76,55.76 ; v1(47.7,78.59) 47.7,77.52 U10.4 48.01,77.22 49.9,77.22 52.21,74.9 R26.2
  BOTTOM w0.178: v1(39.17,62.79) v1(35.1,62.79) ; v1(72.69,71.02) 71.17,72.54 v1(71.17,74.35) ; v1(83.64,81.28) 83.64,81.83 82.77,82.7 81.2,82.7 80.89,82.39 80.89,74.99 v1(81.28,74.6) ; STM32_DEBUG1.4 47.45,95.4 v1(32.46,95.4)
  BOTTOM w0.305: STM32_DEBUG1.4 50.8,93.68 53.57,93.68 57.02,90.22 v3(57.02,88.82) ; v2(82.93,95.3) 82.4,95.83 81.82,95.83 81.39,95.4 77.11,95.4 76.09,94.37 76.09,88.23 75.34,87.48 73.25,87.48 v3(72.78,87.95) 72.32,88.41 72.31,88.41 72.03,88.7 69.72,88.7 67.59,90.83 v3(58.47,90.83)
  BOTTOM w0.381: v2(95.55,65.74) 95.55,66.41 95.73,66.58 95.73,70.18 95.48,70.44 95.48,71.09 95.73,71.35 95.73,71.45 96.05,71.77 96.05,92.41 95,93.46 93.38,93.46 91.63,91.71 88.61,91.71 85.57,94.74 83.49,94.74 v2(82.93,95.3) ; v1(83.11,67.01) 82.8,67.01 v1(81.64,68.17) ; v1(47.7,78.59) 47.7,76.17 v1(44.83,73.3)
VDDBAT_STM32: length 10.8
  TOP w0.178: U13.6 61.07,69.29 61,69.22 v1(61,68.66)
  BOTTOM w0.178: 57.77,62.14 57.77,63.11 61.43,66.77 61.43,67.66 61,68.09 v1(61,68.66)
BOOT0: length 8.3
  TOP w0.178: J11.2 52.44,71.03 52.44,71.63 52.51,71.55 52.97,71.55 53.29,71.87 53.29,72.33 53.04,72.58 R26.1 53.14,73.25 54,74.12 54,74.56 54.32,74.87 54.41,74.87 54.71,75.17 54.71,75.23 55.71,76.22 U13.94
BOOT1: length 27.1
  TOP w0.178: v1(77.77,75.87) 77.08,75.87 76.59,76.37 76.59,76.4 75.9,77.09 R21.1 75.17,77.85 74.3,78.72 U13.37
  BOTTOM w0.178: v1(77.77,75.87) 80.39,73.25 80.39,72.02 83.08,69.33 93.37,69.33 93.53,69.49 PB2.1
KEY1: length 46.4
  TOP w0.178: U13.89 55.38,78.72 55.12,78.47 55.01,78.47 v1(54.62,78.08) ; v1(39.98,68.4) 39.98,73.18 K1.4
  BOTTOM w0.178: K1.2 K1.4 ; v1(39.98,68.4) 40.34,68.4 40.36,68.38 ; 40.36,68.38 42.96,68.38 51.01,76.43 51.32,76.43 52.76,77.87 52.76,77.9 52.93,78.08 v1(54.62,78.08) ; 40.36,68.38 33.76,68.38 PB3.1
LCD_BL_EN: length 24.1
  TOP w0.178: v1(72.19,92.58) 70.94,92.58 Q4.1 69.97,92.61 69.8,92.43 R45.2 ; v1(77.67,94.01) 77.13,93.46 77.13,93.4 76.31,92.58 v1(74.52,92.58) ; J_HX8352A.10 v1(89.42,90.7)
  BOTTOM w0.178: v1(74.52,92.58) v1(72.19,92.58) ; v1(77.67,94.01) 85.45,94.01 88.76,90.7 v1(89.42,90.7)
LCD_BL_K: length 77.6
  TOP w0.305: R44.2 76.53,94.82 76.5,94.79 R43.2 ; R44.2 76.53,95.71 77.13,96.3 77.23,96.3 77.54,96.61 ; R44.2 77.22,95.61 ; J_R61509.34 77.42,95.81 77.22,95.61 ; 77.22,95.61 77.81,95.01 J_R61509.33 ; J_R61509.35 77.54,96.61 ; 77.54,96.61 78.34,97.41 J_R61509.36 79.96,97.33 81.66,97.33 82.95,98.62 82.98,98.62 83.04,98.68 83.07,98.68 83.09,98.7 83.64,98.7 83.65,98.68 86.75,98.68 87.05,98.38 87.05,85.27 87.02,85.24 J_XT350377.21 J_XT350377.20 J_XT350377.19 J_XT350377.18 J_XT350377.17
  TOP w0.381: 84.5,67.15 84.23,66.88 J_ST7585.10 ; 84.5,67.15 v2(84.5,67.22) ; 84.5,67.15 86.75,67.15 87.53,66.37 89.14,66.37 89.47,66.7 J_HX8352A.40 ; J_HX8352A.42 J_HX8352A.41 J_HX8352A.40 ; v1(87.6,71.09) 87.73,71.09 88.14,70.69 v1(88.37,70.69) 88.37,70.04 89.23,69.17 89.23,67.89 89.63,67.5 J_HX8352A.39 J_HX8352A.40 ; v1(87.76,77.8) 87.19,77.24 J_XT350377.11
  BOTTOM w0.178: v1(84.33,81.99) 84.36,82.02 v1(85.09,82.02)
  BOTTOM w0.254: v1(84.33,81.99) 84.33,81.95 84.46,81.82 84.48,81.82 84.82,81.48 84.82,81.46 85.01,81.27 85.05,81.27
  BOTTOM w0.305: v1(85.09,82.02) 85.09,81.31 85.05,81.27
  BOTTOM w0.381: v1(88.37,70.69) 88.05,70.69 87.64,71.09 v1(87.6,71.09) 88.07,71.56 88.14,71.56 89.86,73.27 89.86,76.11 88.17,77.8 v1(87.76,77.8) 87.76,78.56 85.05,81.27
LED1: length 39.7
  TOP w0.178: U13.91 57.42,77.72 57.5,77.8 v1(58.12,77.8) ; R42.2 39.63,64.29 39.46,64.12 v1(39.46,63.49)
  BOTTOM w0.178: PB5.1 29.95,60.47 33.1,63.63 38.78,63.63 38.92,63.49 v1(39.46,63.49) 39.85,63.88 39.98,63.88 52.74,76.64 54.99,76.64 56.14,77.8 v1(58.12,77.8)
OSC32_IN: length 29
  TOP w0.178: PC14.1 61.87,58.6 v1(61.87,65.68) ; C6.2 53.62,68.05 Y2.2 53.91,68.66 54.5,69.24 55.06,69.24 58.17,72.35 61.8,72.35 62.06,72.08 U13.8 62.06,69.85 62.13,69.79 v1(62.13,69.24)
  BOTTOM w0.178: v1(61.87,65.68) 61.87,66.28 62.34,66.75 62.34,68.4 62.13,68.62 v1(62.13,69.24)
OSC32_OUT: length 32.5
  TOP w0.178: PC15.1 65.94,58.08 65.69,58.33 65.45,58.33 64.86,58.92 64.86,59.3 62.79,61.37 v1(62.79,66.34) ; v1(62.89,68.63) 62.89,69.74 62.57,70.06 U13.9 62.57,72.17 62.47,72.27 62.47,72.45 62.24,72.68 58.04,72.68 54.92,69.57 51.89,69.57 Y2.1 50.07,68.66 49.87,68.45 C11.2
  BOTTOM w0.178: v1(62.79,66.34) 62.79,66.56 62.67,66.67 62.67,68.37 62.89,68.59 v1(62.89,68.63)
OSC_IN: length 10.4
  TOP w0.178: U13.12 64.07,68.5 62.72,67.16 Y1.2 60.5,65.2 61.06,64.64 C4.1
OSC_OUT: length 7.9
  TOP w0.178: U13.13 64.57,68.17 Y1.1 65.58,66.23 65.2,65.85 C5.1
PA0: length 19.9
  TOP w0.178: U13.23 69.57,69.31 70.23,68.65 v1(70.23,68.1)
  BOTTOM w0.178: PA0.1 79.57,58.69 79.57,59.75 76.81,62.5 76.27,62.5 75.51,63.26 74.41,63.26 70.62,67.05 70.62,67.71 v1(70.23,68.1)
PA1: length 21.6
  TOP w0.178: v1(71.93,66.98) 71.93,67.53 70.07,69.39 U13.24
  BOTTOM w0.178: PA1.1 83.69,58.11 83.47,58.33 83.23,58.33 82.11,59.45 82.11,59.75 81.52,60.34 81.48,60.34 78.64,63.17 76.54,63.17 75.79,63.92 74.99,63.92 v1(71.93,66.98)
PA2: length 23
  TOP w0.178: v1(70.82,69.82) 70.57,70.07 U13.25 70.57,71.4
  BOTTOM w0.178: PA2.1 86.23,58.11 86.01,58.33 85.95,58.33 85.36,58.92 85.36,59.03 82.32,62.08 81.32,62.08 79.24,64.16 76.48,64.16 v1(70.82,69.82)
PA3: length 28.1
  TOP w0.178: U13.26 72.57,72.99 72.7,72.85 77.48,72.85 v1(77.65,73.03)
  BOTTOM w0.178: PA3.1 88.95,57.78 90.09,58.92 90.09,59.75 89.47,60.38 87.8,60.38 81.09,67.08 81.09,67.96 77.62,71.42 77.62,71.88 77.65,71.9 v1(77.65,73.03)
PA4: length 33.9
  TOP w0.178: PA4.1 92.81,58.09 92.81,59.75 91.82,60.74 87.8,60.74 87.02,61.52 80.76,61.52 78.26,64.02 J_ST7585.5 78.35,65.19 78.35,66.48 v1(77.77,67.06) ; v1(73.99,73.43) 73.99,74.43 73.7,74.72 U13.29
  BOTTOM w0.178: v1(73.99,73.43) 73.99,71.34 74.1,71.22 74.1,70.76 73.99,70.65 73.99,69.94 76.88,67.06 v1(77.77,67.06)
PA5: length 27.6
  TOP w0.178: v1(74.75,73.43) 74.75,74.17 73.7,75.22 U13.30 ; v1(79.12,66.98) 79.45,66.65 J_ST7585.6 79.45,63.56 80.93,62.08 v1(84.43,62.08)
  BOTTOM w0.178: PA5.1 88.06,59.33 85.32,62.08 v1(84.43,62.08) ; v1(74.75,73.43) 74.75,69.65 76.8,67.6 78.5,67.6 v1(79.12,66.98)
PA6: length 31.2
  TOP w0.178: v1(75.51,73.4) 75.51,73.91 73.7,75.72 U13.31 ; v1(76.78,68.63) 76.78,67.26 77.06,66.98 J_ST7585.4 77.06,64.02 77.62,63.46 78.13,63.46 80.45,61.14 86.82,61.14 87.54,60.41 90.73,60.41 PA6.1
  BOTTOM w0.178: v1(75.51,73.4) 75.51,69.35 76.24,68.63 v1(76.78,68.63)
PA7: length 36.5
  TOP w0.178: v1(90.53,58.14) 88.86,58.14 87.66,59.35 87.66,59.46 86.39,60.73 80.39,60.73 77.99,63.13 77.11,63.13 77.08,63.16 76.11,63.16 75.87,63.4 J_ST7585.3 75.87,66.7 76.2,67.03 v1(76.2,69.62) ; v1(76.28,73.45) 75.89,73.84 75.89,74.04 73.7,76.22 U13.32
  BOTTOM w0.178: v1(76.2,69.62) 76.2,71.62 76.28,71.7 v1(76.28,73.45) ; PA7.1 93.47,58.14 v1(90.53,58.14)
PA8: length 35.2
  TOP w0.178: v1(61.67,84.4) 61.67,84.84 62.12,85.29 62.12,85.46 62.57,85.91 U13.67
  BOTTOM w0.178: PA8.1 53.3,67.09 53.66,67.09 61.67,75.11 v1(61.67,84.4)
PA9: length 48.6
  TOP w0.178: UART1.2 68,94.51 62.06,88.58 U13.68 62.06,86.01 61.79,85.74 61.79,85.43 61.13,84.76 61.13,84.12 61.11,84.11 v1(61.11,83.24)
  BOTTOM w0.178: PA9.1 51.09,67.42 53.52,67.42 61.11,75.01 v1(61.11,83.24)
PA10: length 48.7
  TOP w0.178: v1(60.58,84.35) 60.58,84.69 61.46,85.56 61.46,85.98 61.57,86.09 U13.69 61.57,88.82 65.46,92.71 UART1.3
  BOTTOM w0.178: PA10.1 49.8,68.67 49.8,68.75 50.98,69.94 53.64,69.94 57.39,73.69 57.39,74.45 60.57,77.62 60.57,83.46 60.58,83.48 v1(60.58,84.35)
PA11: length 52.4
  TOP w0.178: U13.70 61.13,87.17 61.13,85.7 60.32,84.89 60.26,84.89 59.83,84.47 v1(59.83,83.92) ; PA11.1 38.64,60.05 38.64,62.54 38.62,62.56 38.62,84.09 v1(39.22,84.68) 39.22,85.72
  BOTTOM w0.178: v1(59.83,83.92) 59.28,83.92 58.54,83.17 44.59,83.17 43.08,84.68 v1(39.22,84.68)
PA12: length 55
  TOP w0.178: 37.1,85.59 37.1,69.84 37.95,68.99 37.95,61.9 PA12.1 ; 37.1,85.59 37.1,85.72 ; 37.1,85.59 v1(37.67,85.01) ; U13.71 60.57,85.92 v1(60.16,85.51)
  BOTTOM w0.178: v1(60.16,85.51) 58.15,83.5 48.16,83.5 46.01,85.65 39.41,85.65 38.77,85.01 v1(37.67,85.01)
PA13: length 58.2
  TOP w0.178: v1(60.07,88.65) U13.72 60.07,86.19 59.43,85.56 59.43,85.55 59.23,85.35 59.23,83.57 v1(59.61,83.19)
  BOTTOM w0.178: v1(60.07,88.65) 59.15,88.65 53.73,94.07 52.95,94.07 STM32_DEBUG1.3 ; PA13.1 33.47,59.33 35.75,61.62 39.24,61.62 53.6,75.98 57.18,75.98 57.69,76.49 58.43,76.49 59.61,77.68 v1(59.61,83.19)
PA14: length 37.2
  TOP w0.178: U13.76 56.57,86.26 56.36,86.46 55.44,86.46 53.34,88.56 STM32_DEBUG1.2
  BOTTOM w0.178: STM32_DEBUG1.2 51.81,97.74 30.63,97.74 PA14.1
PA15: length 31.3
  TOP w0.178: U13.77 55.43,84.72 55.17,84.99 55.17,85.97 54.35,86.79 v1(53.8,86.79)
  BOTTOM w0.178: v1(53.8,86.79) 49.34,86.79 41.64,94.49 PA15.1
PB0: length 28.2
  TOP w0.178: U13.35 74.04,77.72 75.17,76.6 75.17,76.27 75.77,75.67 v1(76.45,75.67)
  BOTTOM w0.178: v1(76.45,75.67) 76.84,75.28 77.12,75.28 79.73,72.67 79.73,71.75 82.81,68.67 90.28,68.67 PB0.1
PB1: length 27.2
  TOP w0.178: v1(75.71,76.5) 75.71,76.52 74.01,78.22 U13.36
  BOTTOM w0.178: v1(75.71,76.5) 76.4,76.5 77,75.9 77,75.87 80.06,72.81 80.06,71.88 82.94,69 92.49,69 PB1.1
PB4: length 33.5
  TOP w0.178: U13.90 55.43,78.22 55.19,77.98 55.19,77.77 v1(54.74,77.32)
  BOTTOM w0.178: PB4.1 34.04,66.14 41.19,66.14 51.15,76.1 51.45,76.1 52.68,77.32 v1(54.74,77.32)
PB6: length 38.7
  TOP w0.178: v1(58.2,77.04) 58.2,77.08 58.06,77.22 U13.92
  BOTTOM w0.178: PB6.1 31.55,58.85 31.55,59.51 32.37,60.34 33.62,60.34 35.23,61.95 39.1,61.95 53.47,76.31 55.23,76.31 55.96,77.04 v1(58.2,77.04)
PB7: length 32.5
  TOP w0.178: v1(54.17,75.4) 54.85,76.08 54.85,76.13 55.43,76.72 U13.93
  BOTTOM w0.178: v1(54.17,75.4) 53.62,75.4 39.51,61.29 35.92,61.29 34.14,59.51 34.14,58.45 PB7.1
PB8: length 32.5
  TOP w0.178: v1(57.99,75.84) 57.81,75.84 57.69,75.72 U13.95
  BOTTOM w0.178: PB8.1 35.46,58.08 35.71,58.33 35.8,58.33 36.92,59.45 36.92,59.75 38.13,60.96 39.69,60.96 53.59,74.85 54.39,74.85 54.5,74.96 57.1,74.96 v1(57.99,75.84)
PB9: length 27.1
  TOP w0.178: v1(54.55,74.33) 55.22,75 55.22,75.01 55.43,75.22 U13.96
  BOTTOM w0.178: PB9.1 39.07,58.14 39.07,59.82 53.57,74.33 v1(54.55,74.33)
PB10: length 33.6
  TOP w0.178: v1(75.17,88.28) 75.06,88.28 74.51,87.73 74.51,86.41 74.49,86.39 74.49,85.89 74.51,85.86 74.51,84.53 73.7,83.72 U13.47
  BOTTOM w0.178: v1(75.17,88.28) 75.69,88.8 75.69,92.31 75.69,92.32 75.69,94.69 77.89,96.89 92.54,96.89 PB10.1
PB11: length 32.7
  TOP w0.178: U13.48 73.7,84.22 74.18,84.7 74.18,85.73 74.16,85.75 74.16,86.52 74.18,86.55 74.18,87.87 74.19,87.88 v1(74.19,88.44)
  BOTTOM w0.178: PB11.1 77.97,97.43 75.36,94.83 75.36,92.18 75.36,92.18 75.36,89.61 v1(74.19,88.44)
PB12: length 37
  TOP w0.178: v1(70.48,84.89) 70.57,84.97 U13.51
  BOTTOM w0.178: PB12.1 83.1,62.6 81.26,62.6 79.38,64.49 78.45,64.49 70.59,72.35 70.59,73.28 69.76,74.11 69.76,75.87 69.41,76.23 69.41,82.06 69.74,82.4 69.74,83.59 70.48,84.34 v1(70.48,84.89)
PB13: length 36.6
  TOP w0.178: v1(70,85.62) 70,86.09 70.07,86.16 U13.52
  BOTTOM w0.178: PB13.1 82.31,60.67 81.61,60.67 78.45,63.83 76.34,63.83 75.92,64.25 75.62,64.25 70.27,69.6 70.27,70.05 70.8,70.58 70.8,70.83 70.26,71.37 70.26,73.14 69.43,73.97 69.43,75.73 69.08,76.09 69.08,82.2 69.41,82.53 69.41,83.74 69.94,84.28 69.94,85.56 v1(70,85.62)
PB14: length 35
  TOP w0.178: v1(69.38,84.89) 69.46,84.97 69.46,85.85 69.57,85.96 U13.53
  BOTTOM w0.178: PB14.1 77.6,62.84 76.4,62.84 75.65,63.59 74.55,63.59 71.39,66.75 71.39,67.9 70.32,68.96 70.32,69.08 69.94,69.46 69.94,70.19 70.33,70.58 70.33,70.83 69.93,71.23 69.93,73.01 69.1,73.83 69.1,75.6 68.75,75.95 68.75,82.34 69.08,82.67 69.08,84.04 69.38,84.34 v1(69.38,84.89)
PB15: length 33.1
  TOP w0.178: U13.54 69.07,85.81 v1(68.91,85.65)
  BOTTOM w0.178: v1(68.91,85.65) 68.83,85.57 68.83,84.62 68.75,84.53 68.75,82.81 68.41,82.48 68.41,75.81 68.77,75.46 68.77,73.7 69.6,72.87 69.6,71.1 69.86,70.83 69.86,70.58 69.61,70.33 69.61,69.32 69.68,69.25 69.68,67.4 74.15,62.93 74.97,62.93 PB15.1
PC0: length 79.6
  TOP w0.178: J_HX8352A.2 88.79,97.1 87.57,95.87 87.57,80.93 87.07,80.44 J_XT350377.15 83.66,80.44 v1(82.3,79.07) ; v1(70.31,75.29) 69.92,74.9 69.79,74.9 69.32,74.42 67.81,74.42 67.79,74.41 67.34,74.41 67.32,74.42 66.45,74.42 65.57,73.54 U13.15 65.57,70.09 65.91,69.74 v1(65.91,69.52) ; v1(66.7,61.32) 67.09,60.92 75.85,60.92 77.03,59.75 77.03,58.56 PC0.1 ; v1(81.69,71.78) 79.92,71.78 J_R61509.4 78.33,71.81 78.17,71.66 v1(78.17,71.65)
  BOTTOM w0.178: v1(82.3,79.07) 81.69,78.46 81.69,74.97 81.83,74.83 81.83,74.37 81.69,74.23 v1(81.69,71.78) ; v1(78.17,71.65) 78.17,72.2 78.19,72.22 78.19,73.25 77.28,74.17 76.68,74.17 75.56,75.29 v1(70.31,75.29) ; v1(66.7,61.32) 66.31,61.7 66.31,65.6 66.84,66.13 66.84,67.7 66.13,68.41 66.13,68.42 66.09,68.46 66.09,68.5 65.91,68.68 v1(65.91,69.52)
PC1: length 66.6
  TOP w0.178: v1(83.07,72.35) 82.52,72.35 82.26,72.61 J_R61509.5 78.01,72.61 77.88,72.48 71.76,72.48 70.85,73.39 70.79,73.39 70.74,73.44 66.79,73.44 v1(66.12,72.77) 66.07,72.72 U13.16 ; v3(89.05,92.41) 89.05,91.81 88.63,91.39 88.61,90.89 88.61,81.38 88.58,81.36 88.58,79.57 87.05,78.04 J_XT350377.12 83.91,78.04 83.73,77.86 83.73,77.48 v1(83.34,77.09) ; J_HX8352A.3 v3(89.1,96.3)
  BOTTOM w0.178: v1(83.34,77.09) 83.34,73.37 83.46,73.24 83.46,72.75 83.46,72.74 83.46,72.74 v1(83.07,72.35) ; v1(66.12,72.77) 66.12,70.37 66.42,70.06 66.42,69.79 66.46,69.75 66.46,69.29 66.46,69.29 66.46,68.55 67.17,67.83 67.17,65.85 66.93,65.61 66.93,61.97 67.28,61.62 67.28,58.27 PC1.1 ; v3(89.05,92.41) 89.1,92.46 v3(89.1,96.3)
PC2: length 69.7
  TOP w0.178: v1(68.4,65.89) 67.81,66.48 67.81,67.44 66.57,68.69 U13.17 66.57,72.41 67.26,73.1 67.86,73.1 67.87,73.11 68.33,73.11 68.34,73.1 70.62,73.1 70.66,73.06 70.68,73.06 71.68,72.06 76.31,72.06 v1(77.1,71.28) ; v3(88.49,93.19) 88.3,93 88.27,92.41 88.27,81.51 88.27,81.51 88.24,81.48 88.24,79.81 87.27,78.84 J_XT350377.13 83.81,78.84 83.55,78.57 83.55,78.27 v1(83.16,77.88) ; v1(82.9,70.93) 82.18,70.21 J_R61509.2 77.91,70.21 v1(77.72,70.03) ; J_HX8352A.4 89.17,95.5 89.1,95.43 v3(88.49,95.43)
  BOTTOM w0.178: PC2.1 71.95,58 71.95,59.75 71.81,59.89 71.81,60.12 69.72,62.2 68.1,62.2 67.98,62.32 67.98,64.92 68.4,65.34 v1(68.4,65.89) ; v1(82.9,70.93) 82.9,71.48 82.56,71.82 82.56,72.15 82.51,72.2 82.51,72.57 82.52,72.58 82.52,77.24 v1(83.16,77.88) ; v1(77.1,71.28) 77.1,70.66 v1(77.72,70.03) ; v3(88.49,93.19) v3(88.49,95.43)
PC3: length 65.7
  TOP w0.178: 68.12,72.47 68.2,72.54 70.66,72.54 71.48,71.73 75.53,71.73 76.53,70.73 77.61,70.73 77.89,71.01 J_R61509.3 81.49,71.01 81.52,71.04 v1(82.14,71.04) ; 68.12,72.47 68.1,72.49 v1(68.1,72.57) ; 68.12,72.47 67.25,72.47 67.07,72.29 U13.18 ; J_HX8352A.5 88.75,94.7 87.9,93.84 87.9,80.55 86.98,79.64 J_XT350377.14 83.9,79.64 v1(82.98,78.71)
  BOTTOM w0.178: v1(82.98,78.71) 82.37,78.11 82.37,77.56 82.19,77.38 82.19,72.72 82.18,72.7 82.18,72.06 82.23,72.01 82.23,71.68 82.37,71.54 82.37,71.27 v1(82.14,71.04) ; PC3.1 72.28,58.36 72.28,59.89 72.14,60.03 72.14,60.26 70.08,62.32 70.08,64.1 69.75,64.43 69.75,65.2 69.51,65.45 69.51,66.17 68.69,66.98 68.69,68.59 68.61,68.67 68.61,70.68 68.61,70.69 68.61,72.06 v1(68.1,72.57)
PC4: length 74.7
  TOP w0.178: v1(81.89,63.3) 81.89,63.51 81.84,63.56 ; v1(81.89,63.3) 81.84,63.35 81.84,63.56 ; v1(81.89,63.3) 82.37,62.81 86.13,62.81 v1(86.69,62.26) ; J_HX8352A.12 89.43,89.1 89.41,89.08 v3(89.31,89.08) ; J_ST7585.8 81.84,63.56 ; J_XT350377.31 v3(83.64,93.24) 82.42,93.24 81.79,92.61 J_R61509.30 77.04,92.61 75.74,91.31 v1(74.75,91.31) ; v1(73.43,88.44) 73.33,88.54 72.05,88.54 72.01,88.51 71.63,88.51 71.04,87.92 71.04,84.38 70.29,83.63 70.29,82.83 70.31,82.81 70.31,82.62 71.16,81.77 71.16,81.72 71.24,81.64 71.24,76.92 71.43,76.72 U13.33 73.7,76.72 76.06,74.37 76.15,74.37 v1(77.04,73.48)
  BOTTOM w0.178: v1(73.43,88.44) 73.43,89.99 v1(74.75,91.31) ; PC4.1 93.7,60.17 93.19,60.17 92.63,60.73 88.22,60.73 v1(86.69,62.26) ; v3(83.64,93.24) 85.15,93.24 v3(89.31,89.08) ; v1(81.89,63.3) 81.89,65.09 76.55,70.43 76.55,71.51 77.04,71.99 v1(77.04,73.48)
PC5: length 29
  TOP w0.178: v1(76.91,74.72) 76.25,74.72 74.84,76.13 74.84,76.46 74.07,77.22 U13.34
  BOTTOM w0.178: PC5.1 88.07,68.34 82.67,68.34 79.4,71.61 79.4,72.51 77.2,74.72 v1(76.91,74.72)
PC6: length 32.7
  TOP w0.178: v1(63.86,84.45) 63.86,84.56 64.57,85.27 U13.63
  BOTTOM w0.178: PC6.1 57.3,60.93 58.35,60.93 58.35,60.93 58.62,60.93 63.67,65.97 63.67,66.71 63.33,67.04 63.33,67.83 63.77,68.26 63.77,68.52 63.86,68.61 63.86,68.63 63.89,68.67 63.89,69.69 63.99,69.79 63.99,73.5 64,73.51 64,74.28 63.99,74.28 63.99,82.93 63.89,83.03 63.89,83.49 63.86,83.53 v1(63.86,84.45)
PC7: length 42
  TOP w0.178: v1(63.35,83.2) 63.35,84.19 63.31,84.23 63.31,84.82 64.07,85.58 U13.64 64.07,89.65 64.48,90.07 65.2,90.07 67.46,92.33 R45.1
  BOTTOM w0.178: PC7.1 55.09,61.26 58.49,61.26 63.33,66.11 63.33,66.57 63,66.9 63,67.97 63.44,68.4 63.44,69.7 63.66,69.92 63.66,73.64 63.67,73.64 63.67,74.14 63.66,74.14 63.66,82.34 63.35,82.65 v1(63.35,83.2)
PC8: length 33.3
  TOP w0.178: v1(62.76,84.38) 62.76,85.01 63.57,85.81 U13.65
  BOTTOM w0.178: v1(62.76,84.38) 62.76,83.53 62.8,83.49 62.8,74.56 62.73,74.49 62.72,74.49 62.37,74.14 62.37,74.13 58.47,70.23 58.47,68.99 58.45,68.97 58.45,68.51 58.47,68.49 58.47,68.16 51.5,61.18 51.5,60.5 51.49,60.49 51.49,60.2 PC8.1
PC9: length 34.6
  TOP w0.178: v1(62.26,83.26) 62.26,84.11 62.22,84.15 62.22,84.92 62.45,85.15 62.45,85.2 63.07,85.82 U13.66
  BOTTOM w0.178: PC9.1 48.96,60.21 48.96,60.96 56.6,68.6 56.6,68.86 56.82,69.08 57.62,69.08 58.14,69.6 58.14,70.37 62.04,74.26 62.04,74.28 62.26,74.5 v1(62.26,83.26)
PC10: length 29.9
  TOP w0.178: U13.78 55.43,84.22 54.79,84.87 54.79,85.04 v1(53.8,86.03)
  BOTTOM w0.178: v1(53.8,86.03) 52.57,86.03 52.4,86.19 48.92,86.19 43.17,91.95 PC10.1
PC11: length 32.3
  TOP w0.178: U13.79 57.81,83.72 58.14,84.06 v1(58.14,84.3)
  BOTTOM w0.178: v1(58.14,84.3) 57.61,84.84 47.93,84.84 43.36,89.41 PC11.1
PC12: length 28.3
  TOP w0.178: v1(54.81,84.05) 55.28,83.58 55.28,83.38 55.43,83.22 U13.80
  BOTTOM w0.178: v1(54.81,84.05) 48.08,84.05 45.26,86.87 PC12.1
PC13: length 16.6
  TOP w0.178: PC13.1 59.49,58.45 59.49,61.17 v1(58.53,62.13) ; v1(61.8,68.17) 61.8,68.72 61.57,68.95 U13.7
  BOTTOM w0.178: v1(61.8,68.17) 61.8,66.67 58.53,63.41 v1(58.53,62.13)
PD0: length 75.8
  TOP w0.178: v1(88.35,76.35) 89.45,76.35 89.5,76.3 J_HX8352A.28 ; v1(54.84,82.55) 55.02,82.73 56.56,82.73 U13.81 57.7,82.72 57.88,82.54 69.93,82.54 70.83,81.64 70.83,80.81 v1(70.64,80.62) ; J_XT350377.25 83.91,88.44 83.16,87.69 83.16,82.96 82.42,82.22 82.42,81.77 82.3,81.64 82.3,81.6 v1(82.07,81.37) 81.52,81.37 81.47,81.41 J_R61509.16 77.96,81.41 77.26,80.72 v1(76.34,80.72)
  BOTTOM w0.178: v1(70.64,80.62) 71.19,80.62 71.29,80.72 v1(76.34,80.72) ; v1(88.35,76.35) 87.37,76.35 86.49,77.24 86.02,77.24 84.19,79.07 84.19,79.22 83.48,79.92 83.34,79.92 82.66,80.6 82.66,80.84 82.52,80.98 82.46,80.98 v1(82.07,81.37) ; v1(54.84,82.55) 44.74,82.55 43.16,84.14 38.99,84.14 38.8,84.33 PD0.1
PD1: length 76.2
  TOP w0.178: 57.85,82.07 58,82.07 58.66,81.41 v1(70.28,81.41) ; 57.85,82.07 57.7,82.22 U13.82 ; 57.85,82.07 57.93,81.99 v1(58.06,81.99) ; v1(81.81,82.14) 81.81,82.08 ; 81.81,82.08 82.83,83.1 82.83,88.16 83.91,89.24 J_XT350377.26 ; 81.81,82.08 81.56,82.08 81.42,82.21 J_R61509.17 78.1,82.21 77.9,82.02 77.55,82.02 v1(76.91,81.38) ; v1(88.01,77.04) 88.56,77.04 88.62,77.1 J_HX8352A.27
  BOTTOM w0.178: v1(58.06,81.99) 54.72,81.99 54.52,81.79 PD1.1 ; v1(70.28,81.41) 70.98,81.41 71.01,81.38 v1(76.91,81.38) ; v1(88.01,77.04) 87.74,77.04 87.21,77.57 86.16,77.57 84.52,79.21 84.52,79.35 83.62,80.25 83.48,80.25 83.06,80.67 83.06,81.73 82.84,81.94 82.56,81.94 82.36,82.14 v1(81.81,82.14)
PD2: length 27.7
  TOP w0.178: U13.83 56.53,81.76 55.33,81.76 v1(54.94,81.37)
  BOTTOM w0.178: PD2.1 32.04,81.37 v1(54.94,81.37)
PD3: length 28.5
  TOP w0.178: v1(54.91,80.61) 55.09,80.61 55.71,81.22 U13.84
  BOTTOM w0.178: v1(54.91,80.61) 33.82,80.61 PD3.1
PD4: length 69.3
  TOP w0.178: J_HX8352A.31 89.24,73.9 86.73,76.4 85.48,76.4 J_XT350377.10 83.22,76.44 82.55,77.1 82.55,77.9 81.44,79.01 J_R61509.13 78.34,79.01 78.33,79.03 v1(77.76,79.03) ; U13.85 58.14,80.72 v1(58.29,80.87) 68.22,80.87 v1(70.28,78.82)
  BOTTOM w0.178: PD4.1 32.03,76.28 42.57,76.28 46.35,80.06 57.48,80.06 v1(58.29,80.87) ; v1(77.76,79.03) 77.02,79.03 76.81,78.82 v1(70.28,78.82)
PD5: length 68.7
  TOP w0.178: v1(77.24,78.21) J_R61509.12 81.42,78.21 82.22,77.42 82.22,76.96 83.55,75.64 J_XT350377.9 85.58,75.77 86.9,75.77 89.57,73.1 J_HX8352A.32 ; v1(54.88,79.51) 55.27,79.9 55.27,80.06 55.43,80.22 U13.86 57.74,80.22 57.78,80.27 67.99,80.27 v1(70.33,77.93)
  BOTTOM w0.178: v1(54.88,79.51) 52.6,79.51 51.77,78.68 51.77,78.28 50.91,77.42 50.6,77.42 45.62,72.44 30.73,72.44 PD5.1 ; v1(77.24,78.21) 71.17,78.21 70.88,77.93 v1(70.33,77.93)
PD6: length 35.2
  TOP w0.178: U13.87 v1(58.55,79.72)
  BOTTOM w0.178: v1(58.55,79.72) 55.87,79.72 55.11,78.97 52.52,78.97 52.1,78.54 52.1,78.14 51.04,77.09 50.73,77.09 45.76,72.11 32.94,72.11 PD6.1
PD7: length 71.4
  TOP w0.178: v1(70.43,77.17) 59.93,77.17 58.04,79.06 ; v1(58.04,79.12) 58.04,79.06 ; 58.04,79.06 57.87,79.22 U13.88 ; v3(77.18,76.61) J_R61509.10 81.48,76.61 83.67,74.42 83.98,74.42 84.37,74.04 J_XT350377.7 87.03,74.04 89.57,71.5 J_HX8352A.34
  BOTTOM w0.178: PD7.1 34.77,71.4 45.51,71.4 50.87,76.76 51.18,76.76 52.43,78 52.43,78.4 52.66,78.64 57.56,78.64 v1(58.04,79.12) ; v3(77.18,76.61) 76.63,77.17 v1(70.43,77.17)
PD8: length 60.8
  TOP w0.178: J_HX8352A.17 v1(89.28,85.1) ; v1(68.28,84.86) 68.36,84.94 68.36,85.89 68.57,86.09 U13.55 68.57,88.75 68.7,88.87 72.89,88.87 73.06,89.05 76.61,89.05 v1(77.77,90.21) J_R61509.27
  BOTTOM w0.178: v1(68.28,84.86) 68.28,82.81 68.08,82.61 68.08,75.68 68.44,75.32 68.44,73.56 69.27,72.73 69.27,70.96 69.4,70.83 69.4,70.58 69.28,70.46 69.28,68.94 69.35,68.86 69.35,67.26 70.17,66.45 70.17,66.43 71.78,64.82 71.78,62.87 73.98,60.67 74.69,60.67 PD8.1 ; v1(89.28,85.1) 88.73,85.1 83.61,90.21 v1(77.77,90.21)
PD9: length 60.5
  TOP w0.178: v1(89.29,85.86) 89.36,85.93 91.08,85.93 J_HX8352A.16 ; v1(67.82,85.65) 67.82,85.8 68.07,86.05 U13.56 68.07,89.1 68.24,89.28 72.82,89.28 72.93,89.38 76.14,89.38 v1(77.77,91.01) J_R61509.28
  BOTTOM w0.178: v1(67.82,85.65) 67.74,85.57 67.74,75.5 67.79,75.5 68.11,75.18 68.11,73.33 68.94,72.5 68.94,70.82 69,70.76 69,70.66 68.95,70.6 68.95,68.8 69.02,68.72 69.02,67.12 69.84,66.31 69.84,65.58 70.08,65.34 70.08,64.56 70.41,64.23 70.41,62.45 72.47,60.39 72.47,60.35 PD9.1 ; v1(89.29,85.86) 84.13,91.01 v1(77.77,91.01)
PD10: length 61
  TOP w0.178: J_R61509.29 v1(77.85,91.81) 77.3,91.81 75.2,89.71 72.79,89.71 72.74,89.66 68.05,89.66 67.57,89.17 U13.57 67.57,86.18 67.27,85.88 67.27,84.74 v1(67.19,84.66) ; v1(89.28,86.77) 91.04,86.77 J_HX8352A.15
  BOTTOM w0.178: v1(77.85,91.81) 84.23,91.81 v1(89.28,86.77) ; PD10.1 68.4,61.87 67.96,61.87 67.65,62.18 67.65,65.4 67.83,65.58 67.83,68.11 67.7,68.24 67.61,68.33 67.12,68.82 67.12,70.02 67.08,70.06 67.08,73.65 66.88,73.85 66.88,83.87 66.94,83.94 67.02,83.94 67.19,84.11 v1(67.19,84.66)
PD11: length 67.7
  TOP w0.178: v3(77.88,77.41) J_R61509.11 81.51,77.41 81.89,77.04 81.89,76.71 83.76,74.84 J_XT350377.8 87.03,74.84 89.57,72.3 J_HX8352A.33 ; v1(66.42,89.84) 67.07,89.19 U13.58 67.07,86.15 66.94,86.02 66.94,85.66 v1(66.73,85.45)
  BOTTOM w0.178: v3(77.88,77.41) 78.65,78.19 78.65,81.35 74.33,85.67 73.45,85.67 71.81,87.31 71.63,87.31 71.59,87.35 68.91,87.35 v1(66.42,89.84) ; v1(66.73,85.45) 66.34,85.06 66.34,84.82 66.61,84.55 66.61,84.07 66.55,84.01 66.55,73.99 66.55,73.99 66.55,73.72 66.75,73.51 66.75,69.92 66.79,69.89 66.79,68.68 67.5,67.97 67.5,65.71 67.26,65.47 67.26,62.11 67.61,61.75 67.61,60.12 PD11.1
PD12: length 29.1
  TOP w0.178: U13.59 66.57,86.06 66.07,85.56 v1(66.07,84.3)
  BOTTOM w0.178: v1(66.07,84.3) 66.07,83.75 66.08,83.74 66.08,73.51 65.57,73 65.57,71.66 65.37,71.45 65.37,69.15 65.46,69.07 65.46,68.65 65.76,68.35 65.76,68.32 65.8,68.28 65.8,68.27 66.51,67.56 66.51,66.36 65.86,65.71 PD12.1
PD13: length 29
  TOP w0.178: v1(65.53,83.26) 65.53,84.06 65.52,84.07 65.52,84.53 65.73,84.74 65.73,85.75 66.07,86.09 U13.60
  BOTTOM w0.178: PD13.1 64.66,60.67 64.66,67.75 64.76,67.85 64.76,68.11 65.04,68.39 65.04,71.59 65.24,71.79 65.24,73.14 65.53,73.43 v1(65.53,83.26)
PD14: length 74.8
  TOP w0.178: J_HX8352A.30 v1(89.21,74.7) ; J_XT350377.23 83.91,86.83 83.82,86.75 83.82,83.23 83.82,83.23 83.82,82.69 83.08,81.95 83.08,81.52 83.1,81.51 83.1,80.71 82.61,80.23 82.33,80.23 81.92,79.81 81.86,79.81 ; 81.86,79.81 81.87,79.81 v1(82.12,79.81) ; 81.86,79.81 J_R61509.14 v1(78.11,79.81) ; v1(64.97,84.31) 64.97,84.74 65.4,85.16 65.4,85.92 65.57,86.09 U13.61 65.57,88.59 65.48,88.68 v1(65.48,89.46)
  BOTTOM w0.178: v1(65.48,89.46) 67.92,87.02 71.46,87.02 72.48,86 72.65,86 73.31,85.34 74.19,85.34 78.11,81.43 v1(78.11,79.81) ; v1(82.12,79.81) 82.12,79.81 82.52,79.81 83.07,79.26 83.21,79.26 83.53,78.94 83.53,78.8 85.75,76.58 85.89,76.58 87.77,74.7 v1(89.21,74.7) ; v1(64.97,84.31) 64.97,83.63 64.99,83.62 64.99,73.35 64.91,73.27 64.91,71.93 64.71,71.73 64.71,68.55 64.62,68.47 64.52,68.35 64.52,68.34 64.43,68.25 64.43,67.99 64,67.56 64,67.31 64.33,66.98 64.33,62.88 63.97,62.52 PD14.1
PD15: length 76
  TOP w0.178: v1(81.68,80.44) 81.68,80.61 ; 81.68,80.61 81.73,80.56 82.14,80.56 82.63,81.05 82.63,81.51 82.75,81.63 82.75,82.09 83.49,82.82 83.49,83.09 83.49,83.1 83.49,87.22 83.91,87.64 J_XT350377.24 ; 81.68,80.61 J_R61509.15 77.89,80.61 v1(77.41,80.14) ; v1(88.84,75.76) 89.1,75.5 J_HX8352A.29 ; v1(64.8,88.93) 65.07,88.65 U13.62 65.07,85.3 64.43,84.66 64.43,84.08 64.44,84.07 v1(64.44,83.26)
  BOTTOM w0.178: v1(81.68,80.44) 82.35,80.44 83.2,79.59 83.35,79.59 83.86,79.08 83.86,78.94 85.88,76.91 86.22,76.91 87.38,75.76 v1(88.84,75.76) ; PD15.1 63.64,64.73 64,65.09 64,66.84 63.67,67.17 63.67,67.69 64.1,68.13 64.1,68.39 64.19,68.48 64.19,68.49 64.25,68.55 64.31,68.62 64.37,68.68 64.37,71.86 64.44,71.93 v1(64.44,83.26) ; v1(77.41,80.14) 77.41,80.69 77.46,80.73 77.46,81.61 77.14,81.93 76.08,81.93 71.32,86.69 67.03,86.69 v1(64.8,88.93)
PE0: length 26.6
  TOP w0.178: v1(54.28,73.46) 54.55,73.46 55.09,74 55.09,74.27 55.54,74.72 U13.97
  BOTTOM w0.178: v1(54.28,73.46) 53.16,73.46 39.46,59.75 39.46,58.15 PE0.1
PE1: length 27.6
  TOP w0.178: U13.98 v1(57.94,74.22)
  BOTTOM w0.178: v1(57.94,74.22) 57.94,72.31 53.39,67.75 50,67.75 42,59.75 42,58.15 PE1.1
PE2: length 19.9
  TOP w0.178: v1(57.12,69.62) 57.12,70.17 58.18,71.22 U13.1
  BOTTOM w0.178: PE2.1 46.96,58.42 46.96,59.64 56.27,68.95 56.27,69 56.78,69.51 56.84,69.51 56.95,69.62 v1(57.12,69.62)
PE3: length 19
  TOP w0.178: U13.2 59.07,70.09 57.92,68.95 57.58,68.95 57.55,68.92 57.54,68.92 v1(57.15,68.53)
  BOTTOM w0.178: PE3.1 49.29,58.2 49.29,60.82 56.57,68.1 56.72,68.1 v1(57.15,68.53)
PE4: length 18.9
  TOP w0.178: v1(57.9,68.38) 58.45,68.94 58.45,68.97 58.77,69.29 58.8,69.29 59.57,70.05 U13.3
  BOTTOM w0.178: PE4.1 49.62,58.15 49.62,59.75 50.21,60.34 50.55,60.34 51.17,60.96 51.17,61.65 v1(57.9,68.38)
PE5: length 18.1
  TOP w0.178: v1(59,68.74) 60.07,69.81 U13.4
  BOTTOM w0.178: v1(59,68.74) 59,68.19 51.83,61.03 51.83,58.48 PE5.1
PE6: length 20.4
  TOP w0.178: U13.5 60.57,69.19 60.53,69.16 60.53,68.96 60,68.43 59.99,68.43 58.8,67.24 58.8,65.97 v1(58.35,65.52)
  BOTTOM w0.178: v1(58.35,65.52) 53.16,60.34 52.75,60.34 52.16,59.75 52.16,58.92 52.75,58.33 54.52,58.33 PE6.1
PE7: length 40.1
  TOP w0.178: v1(89.18,77.88) 89.2,77.9 J_HX8352A.26 ; U13.38 73.96,79.22 77.76,83.01 J_R61509.18 81.85,83.01 v1(82.12,83.28) 82.5,83.66 82.5,88.67 83.86,90.04 J_XT350377.27
  BOTTOM w0.178: PE7.1 91.44,75.13 91.44,75.62 v1(89.18,77.88) 85.99,81.07 85.99,81.89 84.6,83.28 v1(82.12,83.28)
PE8: length 43.3
  TOP w0.178: J_XT350377.28 83.75,90.84 82.17,89.26 82.17,84.28 81.71,83.81 J_R61509.19 78.34,83.81 78.34,83.82 77.98,83.82 v1(77.77,83.62) 73.88,79.72 U13.39 ; J_HX8352A.25 v1(89.17,78.7)
  BOTTOM w0.178: v1(77.77,83.62) 81.68,83.62 81.89,83.83 82.35,83.83 82.36,83.82 84.32,83.82 84.55,83.8 86.32,82.03 86.32,81.55 v1(89.17,78.7) 90.42,78.7 PE8.1
PE9: length 42.7
  TOP w0.178: U13.40 73.88,80.22 77.23,83.57 77.23,83.85 77.25,83.87 77.25,84.05 77.61,84.4 77.82,84.4 v1(77.83,84.39) 77.83,84.43 78.01,84.62 J_R61509.20 81.49,84.62 81.84,84.96 81.84,89.59 83.89,91.64 J_XT350377.29 ; J_HX8352A.24 v1(89.23,79.5)
  BOTTOM w0.178: v1(77.83,84.39) 78.21,84.78 83.83,84.78 83.99,84.62 84.22,84.59 86.65,82.17 86.65,81.88 88.64,79.89 88.84,79.89 v1(89.23,79.5) 90.91,79.5 93.29,77.11 PE9.1
PE10: length 42.1
  TOP w0.178: J_XT350377.30 83.91,92.44 81.51,90.04 81.51,85.96 80.96,85.42 J_R61509.21 78.33,85.42 78.07,85.16 77.64,85.16 v1(77.6,85.19) 77.08,84.68 77.08,84.67 76.92,84.51 76.92,84.01 76.9,83.98 76.9,83.71 73.92,80.72 U13.41 ; J_HX8352A.23 v1(89.25,80.3)
  BOTTOM w0.178: PE10.1 91.59,79.65 90.95,80.3 v1(89.25,80.3) 88.7,80.3 86.98,82.01 86.98,82.3 84.12,85.16 84.04,85.16 83.77,85.43 78.38,85.43 78.15,85.19 v1(77.6,85.19)
PE11: length 31.3
  TOP w0.178: J_R61509.22 79.67,86 v1(77.85,86) 77.69,85.85 77.48,85.85 76.93,85.3 76.93,85.26 76.59,84.91 76.59,84.14 76.57,84.12 76.57,83.93 73.86,81.22 U13.42 ; v1(89.13,81.13) 89.16,81.09 J_HX8352A.22
  BOTTOM w0.178: v1(77.85,86) 78.55,86 78.76,86.22 83.45,86.22 84.18,85.49 84.26,85.49 87.31,82.44 87.31,82.4 88.58,81.13 v1(89.13,81.13) 93.47,81.13 PE11.1
PE12: length 32.9
  TOP w0.178: U13.43 73.9,81.72 76.24,84.07 76.24,84.26 76.26,84.28 76.26,85.05 76.6,85.39 76.6,85.44 77.23,86.07 77.23,86.44 77.44,86.65 77.44,86.74 77.83,87.12 ; J_R61509.23 79.81,86.94 78,86.94 77.83,87.12 77.83,87.12 ; 77.83,87.12 v1(77.83,87.13) ; v1(89.17,81.89) 89.17,81.89 J_HX8352A.21
  BOTTOM w0.178: v1(77.83,87.13) 78.38,87.13 78.48,87.02 84.2,87.02 84.95,86.27 84.95,85.54 88.6,81.89 88.62,81.89 v1(89.17,81.89) 91.69,81.89 PE12.1
